# EAGLE board femtoBeacon_r2.0.3_PANELIZED (EAGLE 7.6.0), part 1 of 3
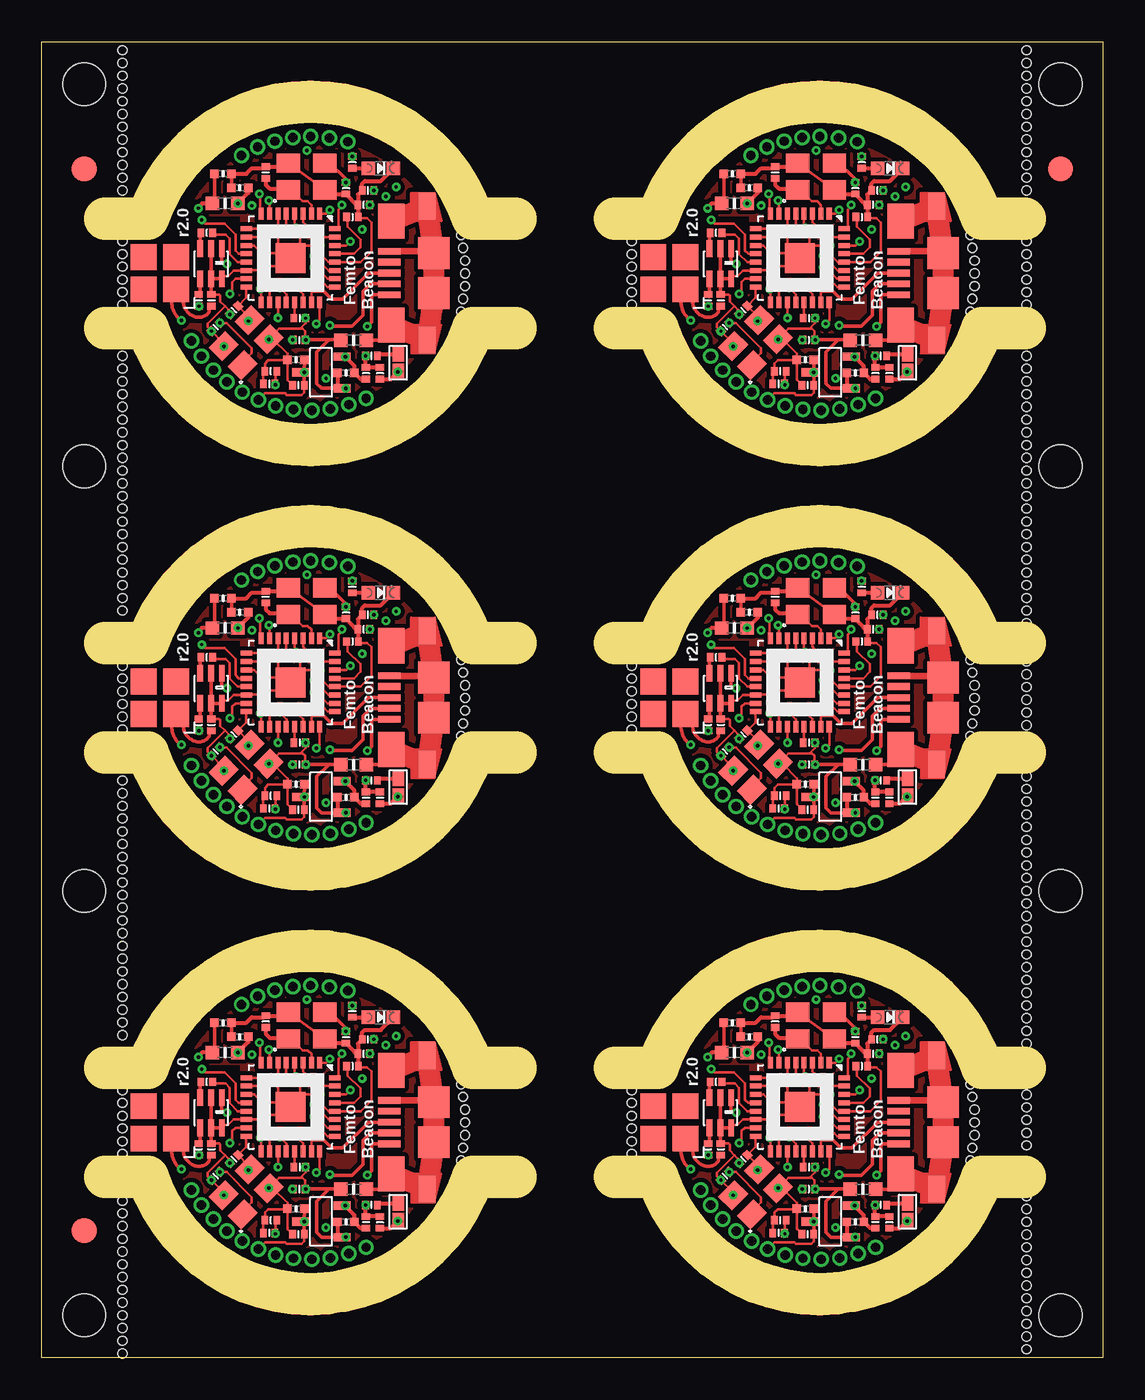
[diagram p0: board, top side]
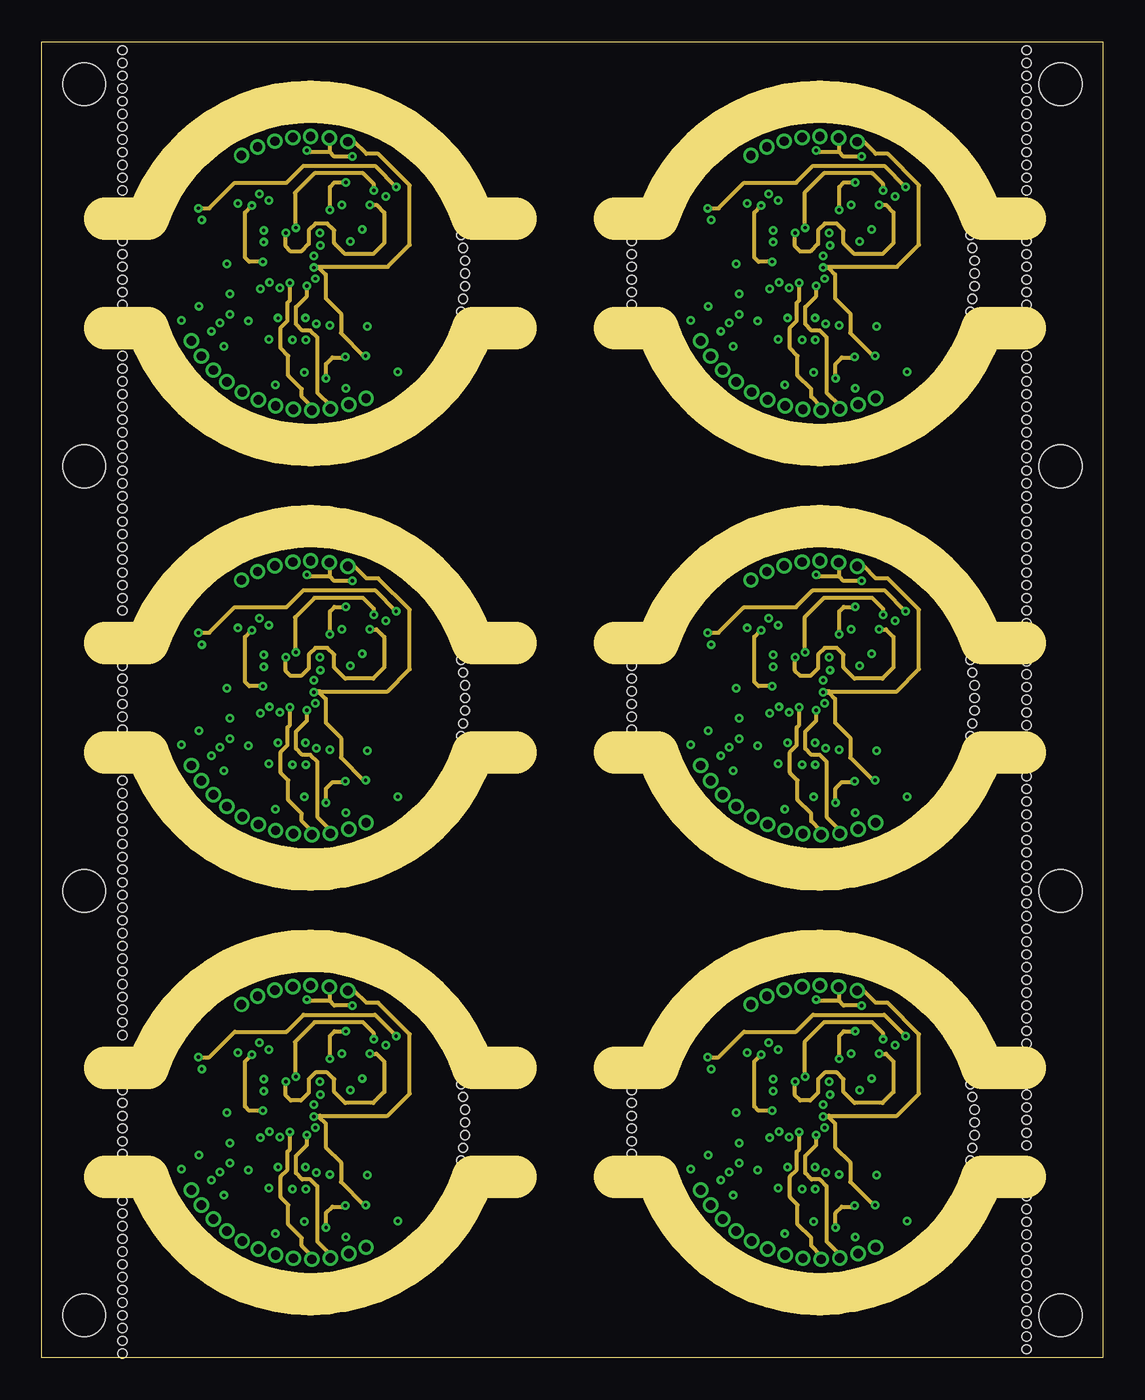
[diagram p1: board, inner layer Route2]
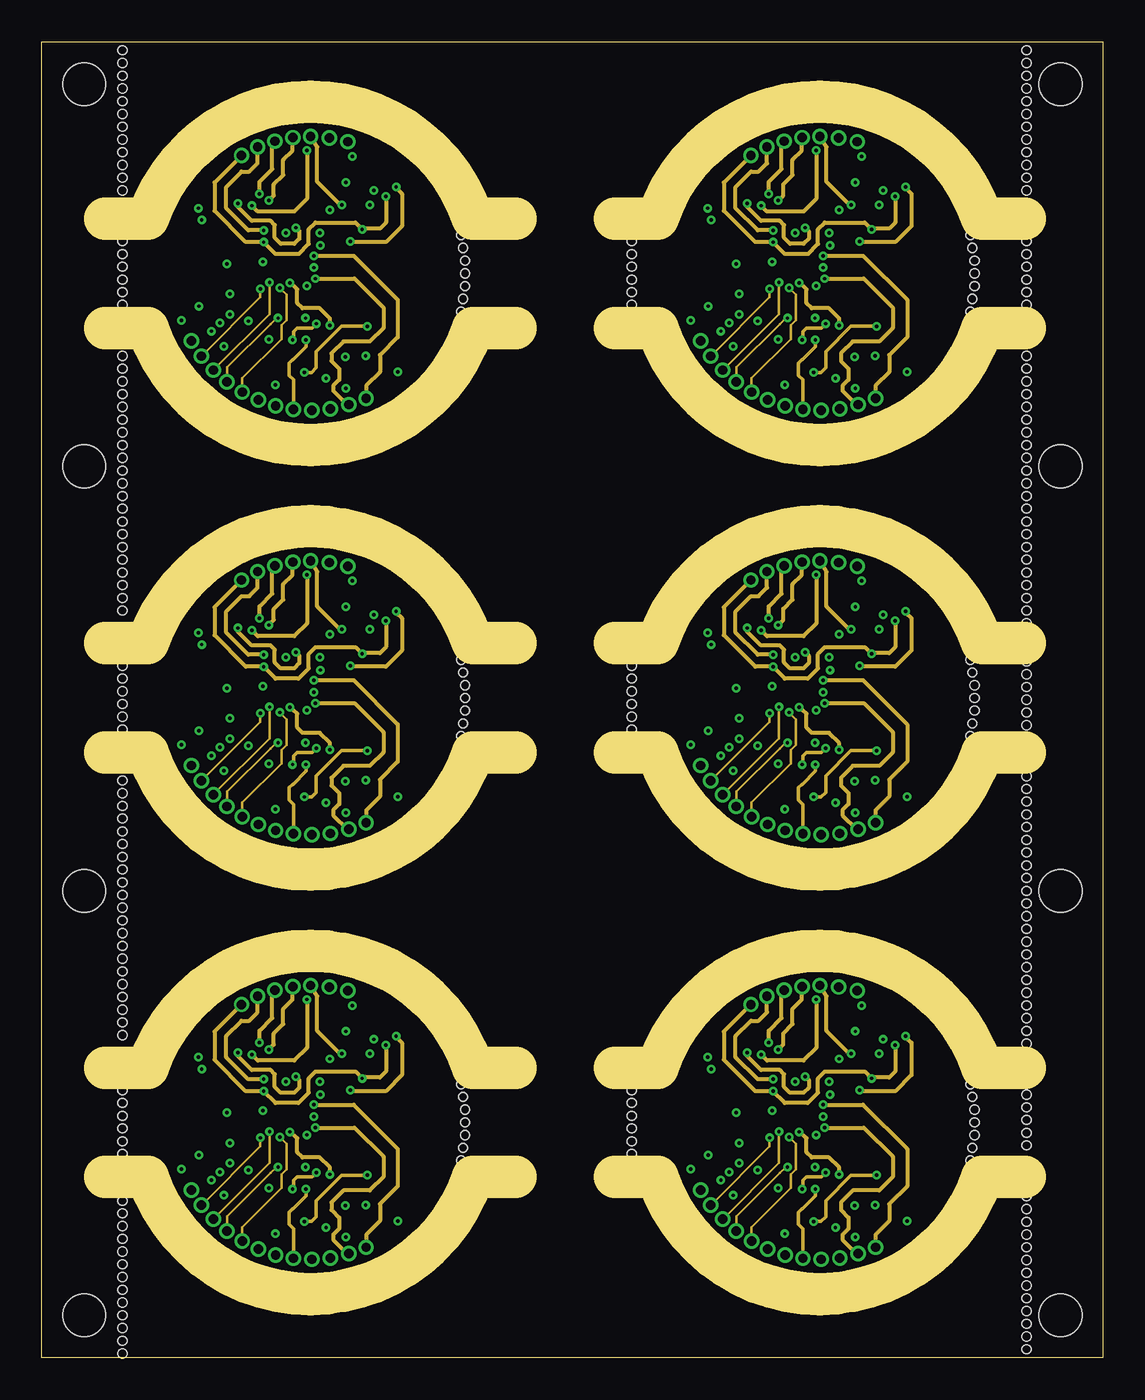
[diagram p2: board, inner layer Route15]
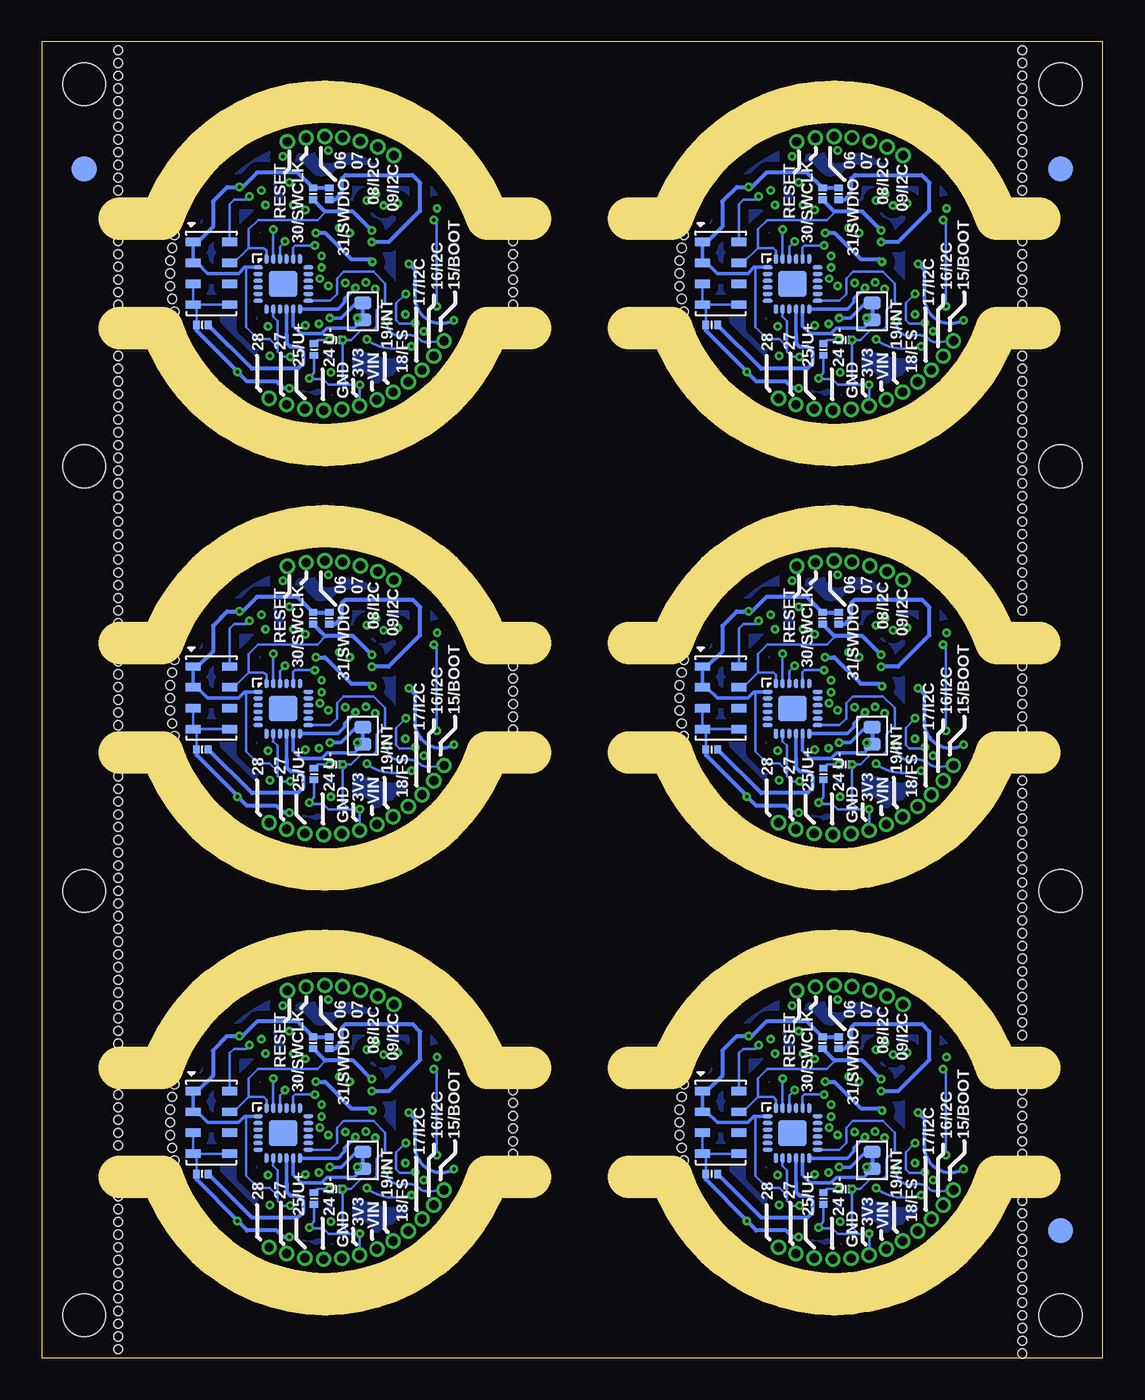
[diagram p3: board, bottom side, seen from below]

Size 63.5 x 78.74 mm. Coordinates in mm from the lower left corner, seen from the top.
Outline: 0,27.94 0,0 33.02,0
Outline: 0,25.4 0,53.34
Outline: 0,50.8 0,78.74 33.02,78.74
Outline: 63.5,27.94 63.5,0 30.48,0
Outline: 63.5,53.34 63.5,25.4
Outline: 30.48,78.74 63.5,78.74 63.5,50.8
Copper layers (1+2*15+16): Top 0.035mm / dielectric 0.7mm / Route2 0.035mm / dielectric 0.15mm / Route15 0.035mm / dielectric 0.2mm / Bottom 0.035mm
Design rules "AQS_custom_4layer": minimum track width 5mil, minimum drill 5mil, track to track 6mil, track to pad 6mil, pad to pad 6mil, via to via 6mil, smd to smd 1mil, copper to edge 15mil, drill to drill 6mil, minimum pad ring 7mil, minimum via ring 3mil, stop-mask expansion 2mil, vias tented up to drill 10mil, thermal gap 10mil
Holes 0.51 mm at 4.83,16 4.83,12.19 4.83,12.95 4.83,13.72 4.83,14.48 4.83,15.24 25.33,14.08 25.08,16.37 25.33,14.84 25.33,13.32 25.21,15.6 25.08,11.79 25.21,12.56 4.83,41.4 4.83,37.59 4.83,38.35 4.83,39.12 4.83,39.88 4.83,40.64 25.33,39.48 25.08,41.77 25.33,40.24 25.33,38.72 25.21,41 25.08,37.19 25.21,37.96 4.83,66.8 4.83,62.99 4.83,63.75 4.83,64.52 4.83,65.28 4.83,66.04 25.33,64.88 25.08,67.17 25.33,65.64 25.33,64.12 25.21,66.4 25.08,62.59 25.21,63.36 35.31,16 35.31,12.19 35.31,12.95 35.31,13.72 35.31,14.48 35.31,15.24 55.81,14.08 55.56,16.37 55.81,14.84 55.81,13.32 55.69,15.6 55.56,11.79 55.69,12.56 35.31,41.4 35.31,37.59 35.31,38.35 35.31,39.12 35.31,39.88 35.31,40.64 55.81,39.48 55.56,41.77 55.81,40.24 55.81,38.72 55.69,41 55.56,37.19 55.69,37.96 35.31,66.8 35.31,62.99 35.31,63.75 35.31,64.52 35.31,65.28 35.31,66.04 55.81,64.88 55.56,67.17 55.81,65.64 55.81,64.12 55.69,66.4 55.56,62.59 55.69,63.36 4.83,69.85 4.83,70.61 4.83,71.37 4.83,72.14 4.83,72.9 4.83,73.66 4.83,74.42 4.83,75.18 4.83,75.95 4.83,76.71 4.83,77.47 4.83,78.23 4.83,59.94 4.83,59.18 4.83,58.42 4.83,57.66 4.83,56.9 4.83,56.13 4.83,55.37 4.83,54.61 4.83,53.85 4.83,53.09 4.83,52.32 4.83,51.56 4.83,50.8 4.83,50.04 4.83,49.28 4.83,48.51 4.83,47.75 4.83,46.99 4.83,46.23 4.83,45.47 4.83,44.7 4.83,34.54 4.83,33.78 4.83,33.02 4.83,32.26 4.83,31.5 4.83,30.73 4.83,29.97 4.83,29.21 4.83,28.45 4.83,27.69 4.83,26.92 4.83,26.16 4.83,25.4 4.83,24.64 4.83,23.88 4.83,23.11 4.83,22.35 4.83,21.59 4.83,20.83 4.83,20.07 4.83,19.3 4.83,9.4 4.83,8.64 4.83,7.87 4.83,7.11 4.83,6.35 4.83,5.59 4.83,4.83 4.83,4.06 4.83,3.3 4.83,2.54 4.83,1.78 4.83,1.02 4.83,0.25 58.93,66.8 58.93,69.85 58.93,70.61 58.93,71.37 58.93,72.14 58.93,72.9 58.93,73.66 58.93,74.42 58.93,75.18 58.93,75.95 58.93,76.71 58.93,77.47 58.93,78.23 58.93,66.04 58.93,65.28 58.93,64.52 58.93,63.75 58.93,62.99 58.93,59.94 58.93,59.18 58.93,58.42 58.93,57.66 58.93,56.9 58.93,56.13 58.93,55.37 58.93,54.61 58.93,53.85 58.93,53.09 58.93,52.32 58.93,51.56 58.93,50.8 58.93,50.04 58.93,49.28 58.93,48.51 58.93,47.75 58.93,46.99 58.93,46.23 58.93,45.47 58.93,44.7 58.93,43.94 58.93,41.66 58.93,40.89 58.93,40.13 58.93,39.37 58.93,38.61 58.93,37.85 58.93,34.8 58.93,34.04 58.93,33.27 58.93,32.51 58.93,31.75 58.93,30.99 58.93,30.23 58.93,29.46 58.93,28.7 58.93,27.94 58.93,27.18 58.93,26.42 58.93,25.65 58.93,24.89 58.93,24.13 58.93,23.37 58.93,22.61 58.93,21.84 58.93,21.08 58.93,20.32 58.93,19.56 58.93,18.8 58.93,15.75 58.93,14.99 58.93,14.22 58.93,13.46 58.93,12.7 58.93,9.65 58.93,8.89 58.93,8.13 58.93,7.37 58.93,6.6 58.93,5.84 58.93,5.08 58.93,4.32 58.93,3.56 58.93,2.79 58.93,2.03 58.93,1.27 58.93,0.51
Holes 2.54 mm at 2.54,2.54 2.54,27.94 2.54,53.34 2.54,76.2 60.96,2.54 60.96,27.94 60.96,76.2 60.96,53.34
Milling: 48 lines

## Footprints (pad centres in the part's own frame; a part is rotated, then mirrored left to right if it is on the bottom)
0805_BALUN = smd 1 x 0.35: 1 -0.9,0.65; 2 -0.9,0; 3 -0.9,-0.65; 4 0.9,-0.65; 5 0.9,0; 6 0.9,0.65
MS5611-01BA03 = smd 0.9 x 0.5: 1 -1.1,1.875; 2 -1.1,0.625; 3 -1.1,-0.625; 4 -1.1,-1.875; 5 1.1,-1.875; 6 1.1,-0.625; 7 1.1,0.625; 8 1.1,1.875
SPST_SMD = smd 0.889 x 0.699: 1 -0.508,0; 2 0.508,0
PART = smd 0.4 x 0.5: 1 -0.35,0; 2 0.35,0
_0402MP = smd 0.5 x 0.5: 1 -0.508,0; 2 0.508,0
_0603MP = smd 0.8 x 0.8: 1 -0.762,0; 2 0.762,0
FIDUCIAL_1MM = smd 1.5 x 1.5: 1 0,0
QFN32 = smd 0.7 x 0.3: 1 -2.65,1.75; 2 -2.65,1.25; 3 -2.65,0.75; 4 -2.65,0.25; 5 -2.65,-0.25; 6 -2.65,-0.75; 7 -2.65,-1.25; 8 -2.65,-1.75; 17 2.65,-1.75; 18 2.65,-1.25; 19 2.65,-0.75; 20 2.65,-0.25; 21 2.65,0.25; 22 2.65,0.75; 23 2.65,1.25; 24 2.65,1.75 | smd 0.3 x 0.7: 9 -1.75,-2.65; 10 -1.25,-2.65; 11 -0.75,-2.65; 12 -0.25,-2.65; 13 0.25,-2.65; 14 0.75,-2.65; 15 1.25,-2.65; 16 1.75,-2.65; 25 1.75,2.65; 26 1.25,2.65; 27 0.75,2.65; 28 0.25,2.65; 29 -0.25,2.65; 30 -0.75,2.65; 31 -1.25,2.65; 32 -1.75,2.65 | smd 1.8 x 1.8: 33 0,0
QFN_3X3MM = smd 0.6 x 0.25: P$1 -1.5,1; P$2 -1.5,0.6; P$3 -1.5,0.2; P$4 -1.5,-0.2; P$5 -1.5,-0.6; P$6 -1.5,-1; P$13 1.5,-1; P$14 1.5,-0.6; P$15 1.5,-0.2; P$16 1.5,0.2; P$17 1.5,0.6; P$18 1.5,1 | smd 0.25 x 0.6: P$7 -1,-1.5; P$8 -0.6,-1.5; P$9 -0.2,-1.5; P$10 0.2,-1.5; P$11 0.6,-1.5; P$12 1,-1.5; P$19 1,1.5; P$20 0.6,1.5; P$21 0.2,1.5; P$22 -0.2,1.5; P$23 -0.6,1.5; P$24 -1,1.5 | smd 1.7 x 1.54: P$25 0,0
MCP1700T-3302E/TT = smd 0.5 x 1: GND -0.95,-1.25; VIN 0,1.25; VOUT 0.95,-1.25
CHIPLED_0603_NOOUTLINE = smd 0.8 x 0.8: A 0,-0.75; C 0,0.75
SOLDER_JUMP_CLOSED = smd 0.762 x 1.016: 1 -0.508,0; 2 0.508,0
1X1_ROUND = drill 0.559 pad 0.864: P$1 0,0
0479480001 = smd 1.54 x 1.54: ANT -0.963,0.963; NC1 0.978,0.963; NC2 0.978,-0.978; NC3 -0.963,-0.978
USB_MICROB_PACKAGE = smd 0.4 x 1.35: 1 -1.3,1.47; 2 -0.64,1.47; 3 0,1.47; 4 0.66,1.47; 5 1.3,1.47 | smd 2.1 x 1.6: 6 -3.1,1.35; 11 3.1,1.35 | smd 1.6 x 1: 7 -4,-0.8; 10 4,-0.8 | smd 1.9 x 1.9: 8 -1.2,-1.2; 9 1.2,-1.2
TSX-3225 = smd 1.4 x 1.15: 1 -1.1,-0.8; 2 1.1,-0.8; 3 1.1,0.8; 4 -1.1,0.8

## Placement (x,y rotation side)
BAL  JOHANSON_2450BM15A0015E  [0805_BALUN]  10.13,14.66 270 top
BAL1  JOHANSON_2450BM15A0015E  [0805_BALUN]  10.13,40.06 270 top
BAL2  JOHANSON_2450BM15A0015E  [0805_BALUN]  10.13,65.46 270 top
BAL3  JOHANSON_2450BM15A0015E  [0805_BALUN]  40.61,14.66 270 top
BAL4  JOHANSON_2450BM15A0015E  [0805_BALUN]  40.61,40.06 270 top
BAL5  JOHANSON_2450BM15A0015E  [0805_BALUN]  40.61,65.46 270 top
BARO  MS5611-01BA03  [MS5611-01BA03]  22.87,14.09 0 bottom
BARO1  MS5611-01BA03  [MS5611-01BA03]  22.87,39.49 0 bottom
BARO2  MS5611-01BA03  [MS5611-01BA03]  22.87,64.89 0 bottom
BARO3  MS5611-01BA03  [MS5611-01BA03]  53.35,14.09 0 bottom
BARO4  MS5611-01BA03  [MS5611-01BA03]  53.35,39.49 0 bottom
BARO5  MS5611-01BA03  [MS5611-01BA03]  53.35,64.89 0 bottom
BTN  DNP  [SPST_SMD]  21.33,8.74 270 top
BTN1  DNP  [SPST_SMD]  21.33,34.14 270 top
BTN2  DNP  [SPST_SMD]  21.33,59.54 270 top
BTN3  DNP  [SPST_SMD]  51.81,8.74 270 top
BTN4  DNP  [SPST_SMD]  51.81,34.14 270 top
BTN5  DNP  [SPST_SMD]  51.81,59.54 270 top
C1  0.1uF  [PART]  20.24,8.1 270 top
C2  0.1uF  [PART]  15.44,11.4 0 top
C3  10pF  [PART]  10.41,10.87 45 top
C4  10pF  [PART]  11.5,11.89 225 top
C5  2.2uF  [_0402MP]  18.21,8.13 180 top
C6  2.2uF  [_0402MP]  15.21,8.91 180 top
C7  0.47uF  [PART]  15.36,7.39 180 top
C8  0.1uF  [PART]  19.53,19.05 180 top
C9  0.1uF  [PART]  18.59,17.45 0 top
C10  0.1uF  [PART]  13.71,8.23 180 top
C11  22pF, C0G, 5%  [PART]  9.87,16.51 180 top
C12  22pF, C0G, 5%  [PART]  9.39,12.47 90 top
C13  DNP  [PART]  10.15,12.47 90 top
C14  9pF  [PART]  13.4,20.12 270 top
C15  9pF  [PART]  18.21,19.18 270 top
C16  0.1uF  [PART]  15.41,10.1 0 top
C17  0.1uF  [PART]  19.27,18.19 180 top
C18  0.1uF  [PART]  20.24,33.5 270 top
C19  0.1uF  [PART]  15.44,36.8 0 top
C20  2.2uF  [_0402MP]  18.21,33.53 180 top
C21  10uF  [_0402MP]  10.84,20.04 180 top
C22  10uF  [_0402MP]  11.86,19.2 0 top
C23  2.2uF  [_0402MP]  15.21,34.31 180 top
C24  0.47uF  [PART]  15.36,32.79 180 top
C25  0.1uF  [PART]  16.73,34.93 90 bottom
C26  0.1uF  [PART]  19.53,44.45 180 top
C27  0.1uF  [PART]  18.59,42.85 0 top
C28  0.1uF  [PART]  15.41,35.5 0 top
C29  0.1uF  [PART]  16.73,9.53 90 bottom
C30  0.1uF  [PART]  15.41,10.1 0 bottom
C31  10nF  [PART]  13.61,7.47 0 top
C32  0.1uF  [PART]  23.41,11 180 bottom
C33  0.1uF  [PART]  19.27,43.59 180 top
C34  10uF  [_0402MP]  10.84,45.44 180 top
C35  10uF  [_0402MP]  11.86,44.6 0 top
C36  0.1uF  [PART]  13.71,33.63 180 top
C37  10pF  [PART]  10.41,36.27 45 top
C38  10pF  [PART]  11.5,37.29 225 top
C39  22pF, C0G, 5%  [PART]  9.87,41.91 180 top
C40  22pF, C0G, 5%  [PART]  9.39,37.87 90 top
C41  DNP  [PART]  10.15,37.87 90 top
C42  9pF  [PART]  13.4,45.52 270 top
C43  9pF  [PART]  18.21,44.58 270 top
C44  10nF  [PART]  13.61,32.87 0 top
C45  0.1uF  [PART]  15.41,35.5 0 bottom
C46  0.1uF  [PART]  23.41,36.4 180 bottom
C47  0.1uF  [PART]  20.24,58.9 270 top
C48  0.1uF  [PART]  15.44,62.2 0 top
C49  2.2uF  [_0402MP]  18.21,58.93 180 top
C50  2.2uF  [_0402MP]  15.21,59.71 180 top
C51  0.47uF  [PART]  15.36,58.19 180 top
C52  0.1uF  [PART]  16.73,60.33 90 bottom
C53  0.1uF  [PART]  19.53,69.85 180 top
C54  0.1uF  [PART]  18.59,68.25 0 top
C55  0.1uF  [PART]  15.41,60.9 0 top
C56  0.1uF  [PART]  19.27,68.99 180 top
C57  10uF  [_0402MP]  10.84,70.84 180 top
C58  10uF  [_0402MP]  11.86,70 0 top
C59  0.1uF  [PART]  13.71,59.03 180 top
C60  10pF  [PART]  10.41,61.67 45 top
C61  10pF  [PART]  11.5,62.69 225 top
C62  22pF, C0G, 5%  [PART]  9.87,67.31 180 top
C63  22pF, C0G, 5%  [PART]  9.39,63.27 90 top
C64  DNP  [PART]  10.15,63.27 90 top
C65  9pF  [PART]  13.4,70.92 270 top
C66  9pF  [PART]  18.21,69.98 270 top
C67  10nF  [PART]  13.61,58.27 0 top
C68  0.1uF  [PART]  15.41,60.9 0 bottom
C69  0.1uF  [PART]  23.41,61.8 180 bottom
C70  0.1uF  [PART]  50.72,8.1 270 top
C71  0.1uF  [PART]  45.92,11.4 0 top
C72  2.2uF  [_0402MP]  48.69,8.13 180 top
C73  2.2uF  [_0402MP]  45.69,8.91 180 top
C74  0.47uF  [PART]  45.84,7.39 180 top
C75  0.1uF  [PART]  47.21,9.53 90 bottom
C76  0.1uF  [PART]  50.01,19.05 180 top
C77  0.1uF  [PART]  49.07,17.45 0 top
C78  0.1uF  [PART]  45.89,10.1 0 top
C79  0.1uF  [PART]  49.75,18.19 180 top
C80  10uF  [_0402MP]  41.32,20.04 180 top
C81  10uF  [_0402MP]  42.34,19.2 0 top
C82  0.1uF  [PART]  44.19,8.23 180 top
C83  10pF  [PART]  40.89,10.87 45 top
C84  10pF  [PART]  41.98,11.89 225 top
C85  22pF, C0G, 5%  [PART]  40.35,16.51 180 top
C86  22pF, C0G, 5%  [PART]  39.87,12.47 90 top
C87  DNP  [PART]  40.63,12.47 90 top
C88  9pF  [PART]  43.88,20.12 270 top
C89  9pF  [PART]  48.69,19.18 270 top
C90  10nF  [PART]  44.09,7.47 0 top
C91  0.1uF  [PART]  45.89,10.1 0 bottom
C92  0.1uF  [PART]  53.89,11 180 bottom
C93  0.1uF  [PART]  50.72,33.5 270 top
C94  0.1uF  [PART]  45.92,36.8 0 top
C95  2.2uF  [_0402MP]  48.69,33.53 180 top
C96  2.2uF  [_0402MP]  45.69,34.31 180 top
C97  0.47uF  [PART]  45.84,32.79 180 top
C98  0.1uF  [PART]  47.21,34.93 90 bottom
C99  0.1uF  [PART]  50.01,44.45 180 top
C100  0.1uF  [PART]  49.07,42.85 0 top
C101  0.1uF  [PART]  45.89,35.5 0 top
C102  0.1uF  [PART]  49.75,43.59 180 top
C103  10uF  [_0402MP]  41.32,45.44 180 top
C104  10uF  [_0402MP]  42.34,44.6 0 top
C105  0.1uF  [PART]  44.19,33.63 180 top
C106  10pF  [PART]  40.89,36.27 45 top
C107  10pF  [PART]  41.98,37.29 225 top
C108  22pF, C0G, 5%  [PART]  40.35,41.91 180 top
C109  22pF, C0G, 5%  [PART]  39.87,37.87 90 top
C110  DNP  [PART]  40.63,37.87 90 top
C111  9pF  [PART]  43.88,45.52 270 top
C112  9pF  [PART]  48.69,44.58 270 top
C113  10nF  [PART]  44.09,32.87 0 top
C114  0.1uF  [PART]  45.89,35.5 0 bottom
C115  0.1uF  [PART]  53.89,36.4 180 bottom
C116  0.1uF  [PART]  50.72,58.9 270 top
C117  0.1uF  [PART]  45.92,62.2 0 top
C118  2.2uF  [_0402MP]  48.69,58.93 180 top
C119  2.2uF  [_0402MP]  45.69,59.71 180 top
C120  0.47uF  [PART]  45.84,58.19 180 top
C121  0.1uF  [PART]  47.21,60.33 90 bottom
C122  0.1uF  [PART]  50.01,69.85 180 top
C123  0.1uF  [PART]  49.07,68.25 0 top
C124  0.1uF  [PART]  45.89,60.9 0 top
C125  0.1uF  [PART]  49.75,68.99 180 top
C126  10uF  [_0402MP]  41.32,70.84 180 top
C127  10uF  [_0402MP]  42.34,70 0 top
C128  0.1uF  [PART]  44.19,59.03 180 top
C129  10pF  [PART]  40.89,61.67 45 top
C130  10pF  [PART]  41.98,62.69 225 top
C131  22pF, C0G, 5%  [PART]  40.35,67.31 180 top
C132  22pF, C0G, 5%  [PART]  39.87,63.27 90 top
C133  DNP  [PART]  40.63,63.27 90 top
C134  9pF  [PART]  43.88,70.92 270 top
C135  9pF  [PART]  48.69,69.98 270 top
C136  10nF  [PART]  44.09,58.27 0 top
C137  0.1uF  [PART]  45.89,60.9 0 bottom
C138  0.1uF  [PART]  53.89,61.8 180 bottom
FB1  [_0603MP]  18.66,10.08 180 top
FB2  [_0603MP]  18.66,35.48 180 top
FB3  [_0603MP]  18.66,60.88 180 top
FB4  [_0603MP]  49.14,10.08 180 top
FB5  [_0603MP]  49.14,35.48 180 top
FB6  [_0603MP]  49.14,60.88 180 top
FID1  FIDUCIAL  [FIDUCIAL_1MM]  2.54,7.62 0 top
FID2  FIDUCIAL  [FIDUCIAL_1MM]  2.54,71.12 0 top
FID3  FIDUCIAL  [FIDUCIAL_1MM]  60.96,71.12 0 top
FID4  FIDUCIAL  [FIDUCIAL_1MM]  2.54,7.62 0 bottom
FID5  FIDUCIAL  [FIDUCIAL_1MM]  2.54,71.12 0 bottom
FID6  FIDUCIAL  [FIDUCIAL_1MM]  60.96,71.12 0 bottom
IC  ATSAMR21E18A-MUT  [QFN32]  14.89,15 270 top
IC1  ATSAMR21E18A-MUT  [QFN32]  14.89,40.4 270 top
IC2  ATSAMR21E18A-MUT  [QFN32]  14.89,65.8 270 top
IC3  ATSAMR21E18A-MUT  [QFN32]  45.37,15 270 top
IC4  ATSAMR21E18A-MUT  [QFN32]  45.37,40.4 270 top
IC5  ATSAMR21E18A-MUT  [QFN32]  45.37,65.8 270 top
IMU  MPU-9250  [QFN_3X3MM]  18.57,13.45 0 bottom
IMU1  MPU-9250  [QFN_3X3MM]  18.57,38.84 0 bottom
IMU2  MPU-9250  [QFN_3X3MM]  18.57,64.25 0 bottom
IMU3  MPU-9250  [QFN_3X3MM]  49.05,13.45 0 bottom
IMU4  MPU-9250  [QFN_3X3MM]  49.05,38.84 0 bottom
IMU5  MPU-9250  [QFN_3X3MM]  49.05,64.25 0 bottom
L1  10uH  [_0603MP]  10.97,43.66 0 top
L2  10uH  [_0603MP]  10.97,69.06 0 top
L3  10uH  [_0603MP]  41.45,18.26 0 top
L4  10uH  [_0603MP]  41.45,43.66 0 top
L5  10uH  [_0603MP]  41.45,69.06 0 top
L6  10uH  [_0603MP]  10.97,18.26 0 top
LDO_VREG  MCP1700T-3302E/TT  [MCP1700T-3302E/TT]  16.72,8.15 90 top
LDO_VREG1  MCP1700T-3302E/TT  [MCP1700T-3302E/TT]  16.72,33.55 90 top
LDO_VREG2  MCP1700T-3302E/TT  [MCP1700T-3302E/TT]  16.72,58.95 90 top
LDO_VREG3  MCP1700T-3302E/TT  [MCP1700T-3302E/TT]  47.2,8.15 90 top
LDO_VREG4  MCP1700T-3302E/TT  [MCP1700T-3302E/TT]  47.2,33.55 90 top
LDO_VREG5  MCP1700T-3302E/TT  [MCP1700T-3302E/TT]  47.2,58.95 90 top
LED1  BLUE  [CHIPLED_0603_NOOUTLINE]  20.29,45.77 270 top
LED2  BLUE  [CHIPLED_0603_NOOUTLINE]  20.29,20.37 270 top
LED3  BLUE  [CHIPLED_0603_NOOUTLINE]  20.29,71.17 270 top
LED4  BLUE  [CHIPLED_0603_NOOUTLINE]  50.77,20.37 270 top
LED5  BLUE  [CHIPLED_0603_NOOUTLINE]  50.77,45.77 270 top
LED6  BLUE  [CHIPLED_0603_NOOUTLINE]  50.77,71.17 270 top
R1  330  [PART]  19.73,9.14 180 top
R2  10K  [PART]  19.4,8.1 270 top
R3  330  [PART]  19.73,34.54 180 top
R4  330  [PART]  18.59,20.73 270 top
R5  10K  [PART]  19.4,33.5 270 top
R6  330  [PART]  18.59,46.13 270 top
R7  2.2K  [PART]  16.78,44.25 90 bottom
R8  2.2K  [PART]  16.78,18.85 90 bottom
R9  2.2K  [PART]  15.82,18.85 90 bottom
R10  2.2K  [PART]  15.82,44.25 90 bottom
R11  330  [PART]  19.73,59.94 180 top
R12  10K  [PART]  19.4,58.9 270 top
R13  330  [PART]  18.59,71.53 270 top
R14  2.2K  [PART]  16.78,69.65 90 bottom
R15  2.2K  [PART]  15.82,69.65 90 bottom
R16  330  [PART]  50.21,9.14 180 top
R17  10K  [PART]  49.88,8.1 270 top
R18  330  [PART]  49.07,20.73 270 top
R19  2.2K  [PART]  47.26,18.85 90 bottom
R20  2.2K  [PART]  46.3,18.85 90 bottom
R21  330  [PART]  50.21,34.54 180 top
R22  10K  [PART]  49.88,33.5 270 top
R23  330  [PART]  49.07,46.13 270 top
R24  2.2K  [PART]  47.26,44.25 90 bottom
R25  2.2K  [PART]  46.3,44.25 90 bottom
R26  330  [PART]  50.21,59.94 180 top
R27  10K  [PART]  49.88,58.9 270 top
R28  330  [PART]  49.07,71.53 270 top
R29  2.2K  [PART]  47.26,69.65 90 bottom
R30  2.2K  [PART]  46.3,69.65 90 bottom
SJ1  SOLDER_JUMPER_CLOSED  [SOLDER_JUMP_CLOSED]  13.81,11.81 270 bottom
SJ2  SOLDER_JUMPER_CLOSED  [SOLDER_JUMP_CLOSED]  13.81,37.21 270 bottom
SJ3  SOLDER_JUMPER_CLOSED  [SOLDER_JUMP_CLOSED]  13.81,62.61 270 bottom
SJ4  SOLDER_JUMPER_CLOSED  [SOLDER_JUMP_CLOSED]  44.29,11.81 270 bottom
SJ5  SOLDER_JUMPER_CLOSED  [SOLDER_JUMP_CLOSED]  44.29,37.21 270 bottom
SJ6  SOLDER_JUMPER_CLOSED  [SOLDER_JUMP_CLOSED]  44.29,62.61 270 bottom
U$1  1X1_ROUND  [1X1_ROUND]  12.96,6.51 0 top
U$2  1X1_ROUND  [1X1_ROUND]  15.06,5.95 0 top
U$3  1X1_ROUND  [1X1_ROUND]  12.96,31.91 0 top
U$4  1X1_ROUND  [1X1_ROUND]  15.06,31.35 0 top
U$5  1X1_ROUND  [1X1_ROUND]  14,6.15 0 top
U$6  1X1_ROUND  [1X1_ROUND]  14,31.55 0 top
U$7  1X1_ROUND  [1X1_ROUND]  18.37,6.23 0 top
U$8  0479480001  [0479480001]  7.08,14.08 180 top
U$9  1X1_ROUND  [1X1_ROUND]  16.16,5.89 0 top
U$10  1X1_ROUND  [1X1_ROUND]  17.27,5.97 0 top
U$11  1X1_ROUND  [1X1_ROUND]  11.99,32.38 0 top
U$12  1X1_ROUND  [1X1_ROUND]  11.08,32.98 0 top
U$13  1X1_ROUND  [1X1_ROUND]  10.27,33.69 0 top
U$14  1X1_ROUND  [1X1_ROUND]  9.56,34.53 0 top
U$15  1X1_ROUND  [1X1_ROUND]  8.95,35.44 0 top
U$16  1X1_ROUND  [1X1_ROUND]  11.96,46.54 0 top
U$17  1X1_ROUND  [1X1_ROUND]  12.92,47.04 0 top
U$18  1X1_ROUND  [1X1_ROUND]  13.95,47.39 0 top
U$19  1X1_ROUND  [1X1_ROUND]  18.32,47.36 0 top
U$20  1X1_ROUND  [1X1_ROUND]  17.2,47.58 0 top
U$21  1X1_ROUND  [1X1_ROUND]  16.08,47.68 0 top
U$22  1X1_ROUND  [1X1_ROUND]  18.37,31.63 0 top
U$23  1X1_ROUND  [1X1_ROUND]  19.41,32 0 top
U$24  1X1_ROUND  [1X1_ROUND]  15.02,47.61 0 top
U$25  1X1_ROUND  [1X1_ROUND]  16.16,31.29 0 top
U$26  1X1_ROUND  [1X1_ROUND]  17.27,31.37 0 top
U$27  0479480001  [0479480001]  7.08,39.48 180 top
U$28  1X1_ROUND  [1X1_ROUND]  12.96,57.31 0 top
U$29  1X1_ROUND  [1X1_ROUND]  15.06,56.75 0 top
U$30  1X1_ROUND  [1X1_ROUND]  14,56.95 0 top
U$31  1X1_ROUND  [1X1_ROUND]  11.99,57.78 0 top
U$32  1X1_ROUND  [1X1_ROUND]  11.08,58.38 0 top
U$33  1X1_ROUND  [1X1_ROUND]  10.27,59.09 0 top
U$34  1X1_ROUND  [1X1_ROUND]  9.56,59.93 0 top
U$35  1X1_ROUND  [1X1_ROUND]  11.99,6.98 0 top
U$36  1X1_ROUND  [1X1_ROUND]  11.08,7.58 0 top
U$37  1X1_ROUND  [1X1_ROUND]  10.27,8.29 0 top
U$38  1X1_ROUND  [1X1_ROUND]  9.56,9.13 0 top
U$39  1X1_ROUND  [1X1_ROUND]  8.95,10.04 0 top
U$40  1X1_ROUND  [1X1_ROUND]  8.95,60.84 0 top
U$41  1X1_ROUND  [1X1_ROUND]  11.96,21.14 0 top
U$42  1X1_ROUND  [1X1_ROUND]  12.92,21.64 0 top
U$43  1X1_ROUND  [1X1_ROUND]  13.95,21.99 0 top
U$44  1X1_ROUND  [1X1_ROUND]  11.96,71.94 0 top
U$45  1X1_ROUND  [1X1_ROUND]  18.32,21.96 0 top
U$46  1X1_ROUND  [1X1_ROUND]  17.2,22.18 0 top
U$47  1X1_ROUND  [1X1_ROUND]  16.08,22.28 0 top
U$48  1X1_ROUND  [1X1_ROUND]  19.41,6.6 0 top
U$49  1X1_ROUND  [1X1_ROUND]  12.92,72.44 0 top
U$50  1X1_ROUND  [1X1_ROUND]  13.95,72.79 0 top
U$51  1X1_ROUND  [1X1_ROUND]  18.32,72.76 0 top
U$52  1X1_ROUND  [1X1_ROUND]  17.2,72.98 0 top
U$53  1X1_ROUND  [1X1_ROUND]  16.08,73.08 0 top
U$54  1X1_ROUND  [1X1_ROUND]  15.02,22.21 0 top
U$55  1X1_ROUND  [1X1_ROUND]  18.37,57.03 0 top
U$56  1X1_ROUND  [1X1_ROUND]  19.41,57.4 0 top
U$57  1X1_ROUND  [1X1_ROUND]  15.02,73.01 0 top
U$58  1X1_ROUND  [1X1_ROUND]  16.16,56.69 0 top
U$59  1X1_ROUND  [1X1_ROUND]  17.27,56.77 0 top
U$60  0479480001  [0479480001]  7.08,64.88 180 top
U$61  1X1_ROUND  [1X1_ROUND]  43.44,6.51 0 top
U$62  1X1_ROUND  [1X1_ROUND]  45.54,5.95 0 top
U$63  1X1_ROUND  [1X1_ROUND]  44.48,6.15 0 top
U$64  1X1_ROUND  [1X1_ROUND]  42.47,6.98 0 top
U$65  1X1_ROUND  [1X1_ROUND]  41.56,7.58 0 top
U$66  1X1_ROUND  [1X1_ROUND]  40.75,8.29 0 top
U$67  1X1_ROUND  [1X1_ROUND]  40.04,9.13 0 top
U$68  1X1_ROUND  [1X1_ROUND]  39.43,10.04 0 top
U$69  1X1_ROUND  [1X1_ROUND]  42.44,21.14 0 top
U$70  1X1_ROUND  [1X1_ROUND]  43.4,21.64 0 top
U$71  1X1_ROUND  [1X1_ROUND]  44.43,21.99 0 top
U$72  1X1_ROUND  [1X1_ROUND]  48.8,21.96 0 top
U$73  1X1_ROUND  [1X1_ROUND]  47.68,22.18 0 top
U$74  1X1_ROUND  [1X1_ROUND]  46.56,22.28 0 top
U$75  1X1_ROUND  [1X1_ROUND]  48.85,6.23 0 top
U$76  1X1_ROUND  [1X1_ROUND]  49.89,6.6 0 top
U$77  1X1_ROUND  [1X1_ROUND]  45.5,22.21 0 top
U$78  1X1_ROUND  [1X1_ROUND]  46.64,5.89 0 top
U$79  1X1_ROUND  [1X1_ROUND]  47.75,5.97 0 top
U$80  0479480001  [0479480001]  37.56,14.08 180 top
U$81  1X1_ROUND  [1X1_ROUND]  43.44,31.91 0 top
U$82  1X1_ROUND  [1X1_ROUND]  45.54,31.35 0 top
U$83  1X1_ROUND  [1X1_ROUND]  44.48,31.55 0 top
U$84  1X1_ROUND  [1X1_ROUND]  42.47,32.38 0 top
U$85  1X1_ROUND  [1X1_ROUND]  41.56,32.98 0 top
U$86  1X1_ROUND  [1X1_ROUND]  40.75,33.69 0 top
U$87  1X1_ROUND  [1X1_ROUND]  40.04,34.53 0 top
U$88  1X1_ROUND  [1X1_ROUND]  39.43,35.44 0 top
U$89  1X1_ROUND  [1X1_ROUND]  42.44,46.54 0 top
U$90  1X1_ROUND  [1X1_ROUND]  43.4,47.04 0 top
U$91  1X1_ROUND  [1X1_ROUND]  44.43,47.39 0 top
U$92  1X1_ROUND  [1X1_ROUND]  48.8,47.36 0 top
U$93  1X1_ROUND  [1X1_ROUND]  47.68,47.58 0 top
U$94  1X1_ROUND  [1X1_ROUND]  46.56,47.68 0 top
U$95  1X1_ROUND  [1X1_ROUND]  48.85,31.63 0 top
U$96  1X1_ROUND  [1X1_ROUND]  49.89,32 0 top
U$97  1X1_ROUND  [1X1_ROUND]  45.5,47.61 0 top
U$98  1X1_ROUND  [1X1_ROUND]  46.64,31.29 0 top
U$99  1X1_ROUND  [1X1_ROUND]  47.75,31.37 0 top
U$100  0479480001  [0479480001]  37.56,39.48 180 top
U$101  1X1_ROUND  [1X1_ROUND]  43.44,57.31 0 top
U$102  1X1_ROUND  [1X1_ROUND]  45.54,56.75 0 top
U$103  1X1_ROUND  [1X1_ROUND]  44.48,56.95 0 top
U$104  1X1_ROUND  [1X1_ROUND]  42.47,57.78 0 top
U$105  1X1_ROUND  [1X1_ROUND]  41.56,58.38 0 top
U$106  1X1_ROUND  [1X1_ROUND]  40.75,59.09 0 top
U$107  1X1_ROUND  [1X1_ROUND]  40.04,59.93 0 top
U$108  1X1_ROUND  [1X1_ROUND]  39.43,60.84 0 top
U$109  1X1_ROUND  [1X1_ROUND]  42.44,71.94 0 top
U$110  1X1_ROUND  [1X1_ROUND]  43.4,72.44 0 top
U$111  1X1_ROUND  [1X1_ROUND]  44.43,72.79 0 top
U$112  1X1_ROUND  [1X1_ROUND]  48.8,72.76 0 top
U$113  1X1_ROUND  [1X1_ROUND]  47.68,72.98 0 top
U$114  1X1_ROUND  [1X1_ROUND]  46.56,73.08 0 top
U$115  1X1_ROUND  [1X1_ROUND]  48.85,57.03 0 top
U$116  1X1_ROUND  [1X1_ROUND]  49.89,57.4 0 top
U$117  1X1_ROUND  [1X1_ROUND]  45.5,73.01 0 top
U$118  1X1_ROUND  [1X1_ROUND]  46.64,56.69 0 top
U$119  1X1_ROUND  [1X1_ROUND]  47.75,56.77 0 top
U$120  0479480001  [0479480001]  37.56,64.88 180 top
USB  USB_MICROB  [USB_MICROB_PACKAGE]  22.26,14.1 90 top
USB1  USB_MICROB  [USB_MICROB_PACKAGE]  22.26,39.5 90 top
USB2  USB_MICROB  [USB_MICROB_PACKAGE]  22.26,64.9 90 top
USB3  USB_MICROB  [USB_MICROB_PACKAGE]  52.74,14.1 90 top
USB4  USB_MICROB  [USB_MICROB_PACKAGE]  52.74,39.5 90 top
USB5  USB_MICROB  [USB_MICROB_PACKAGE]  52.74,64.9 90 top
XOSC  12MHz  [TSX-3225]  12.24,9.93 45 top
XOSC1  12MHz  [TSX-3225]  12.24,35.33 45 top
XOSC2  12MHz  [TSX-3225]  12.24,60.73 45 top
XOSC3  12MHz  [TSX-3225]  42.72,9.93 45 top
XOSC4  12MHz  [TSX-3225]  42.72,35.33 45 top
XOSC5  12MHz  [TSX-3225]  42.72,60.73 45 top
XOSCRF  16MHz  [TSX-3225]  15.85,19.88 0 top
XOSCRF1  16MHz  [TSX-3225]  15.85,45.28 0 top
XOSCRF2  16MHz  [TSX-3225]  15.85,70.68 0 top
XOSCRF3  16MHz  [TSX-3225]  46.33,19.88 0 top
XOSCRF4  16MHz  [TSX-3225]  46.33,45.28 0 top
XOSCRF5  16MHz  [TSX-3225]  46.33,70.68 0 top

## Library data of the parts
BAL BAL1-BAL5 = balun
BARO BARO1-BARO5 = freeimu
BTN BTN1-BTN5 USB USB1-USB5 = femtoduino
C1-C4 C8-C19 C25-C33 C36-C48 C52-C56 C59-C71 C75-C79 C82-C94 C98-C102 C105-C117 C121-C125 C128-C138 = parts_0201; DIGIKEY_PART: 490-3194-1-ND
C5 C6 C20-C23 C34 C35 C49 C50 C57 C58 C72 C73 C80 C81 C95 C96 C103 C104 C118 C119 C126 C127 FB1-FB6 L1-L6 LED1-LED6 = microbuilder
C7 C24 C51 C74 C97 C120 R1-R30 = parts_0201
FID1-FID6 = adafruit
IC IC1-IC5 = atmel-samr21
IMU IMU1-IMU5 = mpu9250
LDO_VREG LDO_VREG1-LDO_VREG5 = MCP1700T-3302E_TT
SJ1-SJ6 = solder-jumpers
U$1-U$7 U$9-U$26 U$28-U$59 U$61-U$79 U$81-U$99 U$101-U$119 = pins_1.27mm_pitch
U$8 U$27 U$60 U$80 U$100 U$120 = molex-antenna-2.4GHz
XOSC XOSC1-XOSC5 XOSCRF XOSCRF1-XOSCRF5 = crystals

## Nets
3.3V: BARO.1 BARO.2 C5.1 C10.1 C16.1 C21.2 C29.1 C30.2 C31.2 IC.24 IC.30 IMU.P$1 IMU.P$8 IMU.P$13 IMU.P$22 L6.1 LDO_VREG.VOUT R2.2 R8.2 R9.2 U$5.P$1
3.3V1: BARO1.1 BARO1.2 C20.1 C25.1 C28.1 C34.2 C36.1 C44.2 C45.2 IC1.24 IC1.30 IMU1.P$1 IMU1.P$8 IMU1.P$13 IMU1.P$22 L1.1 LDO_VREG1.VOUT R5.2 R7.2 R10.2 U$6.P$1
3.3V2: BARO2.1 BARO2.2 C49.1 C52.1 C55.1 C57.2 C59.1 C67.2 C68.2 IC2.24 IC2.30 IMU2.P$1 IMU2.P$8 IMU2.P$13 IMU2.P$22 L2.1 LDO_VREG2.VOUT R12.2 R14.2 R15.2 U$30.P$1
3.3V3: BARO3.1 BARO3.2 C72.1 C75.1 C78.1 C80.2 C82.1 C90.2 C91.2 IC3.24 IC3.30 IMU3.P$1 IMU3.P$8 IMU3.P$13 IMU3.P$22 L3.1 LDO_VREG3.VOUT R17.2 R19.2 R20.2 U$63.P$1
3.3V4: BARO4.1 BARO4.2 C95.1 C98.1 C101.1 C103.2 C105.1 C113.2 C114.2 IC4.24 IC4.30 IMU4.P$1 IMU4.P$8 IMU4.P$13 IMU4.P$22 L4.1 LDO_VREG4.VOUT R22.2 R24.2 R25.2 U$83.P$1
3.3V5: BARO5.1 BARO5.2 C118.1 C121.1 C124.1 C126.2 C128.1 C136.2 C137.2 IC5.24 IC5.30 IMU5.P$1 IMU5.P$8 IMU5.P$13 IMU5.P$22 L5.1 LDO_VREG5.VOUT R27.2 R29.2 R30.2 U$103.P$1
ANT_OUT: BAL.1 C13.1 U$8.ANT
ANT_OUT1: BAL1.1 C41.1 U$27.ANT
ANT_OUT2: BAL2.1 C64.1 U$60.ANT
ANT_OUT3: BAL3.1 C87.1 U$80.ANT
ANT_OUT4: BAL4.1 C110.1 U$100.ANT
ANT_OUT5: BAL5.1 C133.1 U$120.ANT
AVDD: C17.1 IC.5
AVDD1: C33.1 IC1.5
AVDD2: C56.1 IC2.5
AVDD3: C79.1 IC3.5
AVDD4: C102.1 IC4.5
AVDD5: C125.1 IC5.5
DVDD: C2.1 IC.21
DVDD1: C19.1 IC1.21
DVDD2: C48.1 IC2.21
DVDD3: C71.1 IC3.21
DVDD4: C94.1 IC4.21
DVDD5: C117.1 IC5.21
GND: BAL.2 BAL.5 BAL.6 BARO.3 BARO.4 BARO.5 BTN.2 C1.2 C2.2 C3.1 C4.2 C5.2 C6.2 C7.2 C8.2 C9.2 C10.2 C13.2 C14.1 C15.2 C16.2 C17.2 C21.1 C22.1 C29.2 C30.1 C31.1 C32.2 FB1.2 IC.3 IC.6 IC.11 IC.14 IC.28 IC.33 IMU.P$20 LDO_VREG.GND LED2.C SJ1.1 U$2.P$1 XOSC.2 XOSC.4 XOSCRF.2 XOSCRF.4
GND1: BAL1.2 BAL1.5 BAL1.6 BARO1.3 BARO1.4 BARO1.5 BTN1.2 C18.2 C19.2 C20.2 C23.2 C24.2 C25.2 C26.2 C27.2 C28.2 C33.2 C34.1 C35.1 C36.2 C37.1 C38.2 C41.2 C42.1 C43.2 C44.1 C45.1 C46.2 FB2.2 IC1.3 IC1.6 IC1.11 IC1.14 IC1.28 IC1.33 IMU1.P$20 LDO_VREG1.GND LED1.C SJ2.1 U$4.P$1 XOSC1.2 XOSC1.4 XOSCRF1.2 XOSCRF1.4
GND2: BAL2.2 BAL2.5 BAL2.6 BARO2.3 BARO2.4 BARO2.5 BTN2.2 C47.2 C48.2 C49.2 C50.2 C51.2 C52.2 C53.2 C54.2 C55.2 C56.2 C57.1 C58.1 C59.2 C60.1 C61.2 C64.2 C65.1 C66.2 C67.1 C68.1 C69.2 FB3.2 IC2.3 IC2.6 IC2.11 IC2.14 IC2.28 IC2.33 IMU2.P$20 LDO_VREG2.GND LED3.C SJ3.1 U$29.P$1 XOSC2.2 XOSC2.4 XOSCRF2.2 XOSCRF2.4
GND3: BAL3.2 BAL3.5 BAL3.6 BARO3.3 BARO3.4 BARO3.5 BTN3.2 C70.2 C71.2 C72.2 C73.2 C74.2 C75.2 C76.2 C77.2 C78.2 C79.2 C80.1 C81.1 C82.2 C83.1 C84.2 C87.2 C88.1 C89.2 C90.1 C91.1 C92.2 FB4.2 IC3.3 IC3.6 IC3.11 IC3.14 IC3.28 IC3.33 IMU3.P$20 LDO_VREG3.GND LED4.C SJ4.1 U$62.P$1 XOSC3.2 XOSC3.4 XOSCRF3.2 XOSCRF3.4
GND4: BAL4.2 BAL4.5 BAL4.6 BARO4.3 BARO4.4 BARO4.5 BTN4.2 C93.2 C94.2 C95.2 C96.2 C97.2 C98.2 C99.2 C100.2 C101.2 C102.2 C103.1 C104.1 C105.2 C106.1 C107.2 C110.2 C111.1 C112.2 C113.1 C114.1 C115.2 FB5.2 IC4.3 IC4.6 IC4.11 IC4.14 IC4.28 IC4.33 IMU4.P$20 LDO_VREG4.GND LED5.C SJ5.1 U$82.P$1 XOSC4.2 XOSC4.4 XOSCRF4.2 XOSCRF4.4
GND5: BAL5.2 BAL5.5 BAL5.6 BARO5.3 BARO5.4 BARO5.5 BTN5.2 C116.2 C117.2 C118.2 C119.2 C120.2 C121.2 C122.2 C123.2 C124.2 C125.2 C126.1 C127.1 C128.2 C129.1 C130.2 C133.2 C134.1 C135.2 C136.1 C137.1 C138.2 FB6.2 IC5.3 IC5.6 IC5.11 IC5.14 IC5.28 IC5.33 IMU5.P$20 LDO_VREG5.GND LED6.C SJ6.1 U$102.P$1 XOSC5.2 XOSC5.4 XOSCRF5.2 XOSCRF5.4
N$1: BAL.3 C11.2
N$2: BTN1.1 R3.1
N$3: BAL.4 C12.2
N$4: C32.1 IMU.P$10
N$5: FB1.1 USB.5 USB.6 USB.7 USB.8 USB.9 USB.10 USB.11
N$6: LED1.A R6.2
N$7: BAL1.3 C39.2
N$8: BAL1.4 C40.2
N$9: C46.1 IMU1.P$10
N$10: FB2.1 USB1.5 USB1.6 USB1.7 USB1.8 USB1.9 USB1.10 USB1.11
N$11: BTN2.1 R11.1
N$12: LED3.A R13.2
N$13: LED2.A R4.2
N$14: BAL2.3 C62.2
N$15: BAL2.4 C63.2
N$16: C69.1 IMU2.P$10
N$17: FB3.1 USB2.5 USB2.6 USB2.7 USB2.8 USB2.9 USB2.10 USB2.11
N$18: BTN3.1 R16.1
N$19: LED4.A R18.2
N$20: BAL3.3 C85.2
N$21: BAL3.4 C86.2
N$22: C92.1 IMU3.P$10
N$23: FB4.1 USB3.5 USB3.6 USB3.7 USB3.8 USB3.9 USB3.10 USB3.11
N$24: BTN4.1 R21.1
N$25: LED5.A R23.2
N$26: BTN.1 R1.1
N$27: BAL4.3 C108.2
N$28: BAL4.4 C109.2
N$29: C115.1 IMU4.P$10
N$30: FB5.1 USB4.5 USB4.6 USB4.7 USB4.8 USB4.9 USB4.10 USB4.11
N$31: BTN5.1 R26.1
N$32: LED6.A R28.2
N$33: BAL5.3 C131.2
N$34: BAL5.4 C132.2
N$35: C138.1 IMU5.P$10
N$36: FB6.1 USB5.5 USB5.6 USB5.7 USB5.8 USB5.9 USB5.10 USB5.11
PA1: IC1.25 U$22.P$1
PA2: IC1.27 U$23.P$1
PA3: IC2.25 U$55.P$1
PA4: IC2.27 U$56.P$1
PA5: IC3.25 U$75.P$1
PA6: IC3.27 U$76.P$1
PA06/A0: IC.7 U$54.P$1
PA06/A1: IC1.7 U$24.P$1
PA06/A2: IC2.7 U$57.P$1
PA06/A3: IC3.7 U$77.P$1
PA06/A4: IC4.7 U$97.P$1
PA06/A5: IC5.7 U$117.P$1
PA7: IC4.25 U$95.P$1
PA07/A1: IC.8 U$43.P$1
PA07/A2: IC1.8 U$18.P$1
PA07/A3: IC2.8 U$50.P$1
PA07/A4: IC3.8 U$71.P$1
PA07/A5: IC4.8 U$91.P$1
PA07/A6: IC5.8 U$111.P$1
PA8: IC4.27 U$96.P$1
PA08/I2C/SDA: BARO.7 IC.9 IMU.P$24 R8.1 U$42.P$1
PA08/I2C/SDA1: BARO1.7 IC1.9 IMU1.P$24 R7.1 U$17.P$1
PA08/I2C/SDA2: BARO2.7 IC2.9 IMU2.P$24 R14.1 U$49.P$1
PA08/I2C/SDA3: BARO3.7 IC3.9 IMU3.P$24 R19.1 U$70.P$1
PA08/I2C/SDA4: BARO4.7 IC4.9 IMU4.P$24 R24.1 U$90.P$1
PA08/I2C/SDA5: BARO5.7 IC5.9 IMU5.P$24 R29.1 U$110.P$1
PA9: IC5.25 U$115.P$1
PA09/I2C/SCL: BARO.8 IC.10 IMU.P$23 R9.1 U$41.P$1
PA09/I2C/SCL1: BARO1.8 IC1.10 IMU1.P$23 R10.1 U$16.P$1
PA09/I2C/SCL2: BARO2.8 IC2.10 IMU2.P$23 R15.1 U$44.P$1
PA09/I2C/SCL3: BARO3.8 IC3.10 IMU3.P$23 R20.1 U$69.P$1
PA09/I2C/SCL4: BARO4.8 IC4.10 IMU4.P$23 R25.1 U$89.P$1
PA09/I2C/SCL5: BARO5.8 IC5.10 IMU5.P$23 R30.1 U$109.P$1
PA10: IC5.27 U$116.P$1
PA14/XIN_MC/RX: C3.2 IC.15 XOSC.1
PA14/XIN_MC/RX1: C37.2 IC1.15 XOSC1.1
PA14/XIN_MC/RX2: C60.2 IC2.15 XOSC2.1
PA14/XIN_MC/RX3: C83.2 IC3.15 XOSC3.1
PA14/XIN_MC/RX4: C106.2 IC4.15 XOSC4.1
PA14/XIN_MC/RX5: C129.2 IC5.15 XOSC5.1
PA15/XOUT_MC/TX: C4.1 IC.16 U$39.P$1 XOSC.3
PA15/XOUT_MC/TX1: C38.1 IC1.16 U$15.P$1 XOSC1.3
PA15/XOUT_MC/TX2: C61.1 IC2.16 U$40.P$1 XOSC2.3
PA15/XOUT_MC/TX3: C84.1 IC3.16 U$68.P$1 XOSC3.3
PA15/XOUT_MC/TX4: C107.1 IC4.16 U$88.P$1 XOSC4.3
PA15/XOUT_MC/TX5: C130.1 IC5.16 U$108.P$1 XOSC5.3
PA16/I2C: IC.17 U$38.P$1
PA16/I2C1: IC1.17 U$14.P$1
PA16/I2C2: IC2.17 U$34.P$1
PA16/I2C3: IC3.17 U$67.P$1
PA16/I2C4: IC4.17 U$87.P$1
PA16/I2C5: IC5.17 U$107.P$1
PA17/I2C: IC.18 U$37.P$1
PA17/I2C1: IC1.18 U$13.P$1
PA17/I2C2: IC2.18 U$33.P$1
PA17/I2C3: IC3.18 U$66.P$1
PA17/I2C4: IC4.18 U$86.P$1
PA17/I2C5: IC5.18 U$106.P$1
PA18/FSYNC: IC.19 IMU.P$11 SJ1.2 U$36.P$1
PA18/FSYNC1: IC1.19 IMU1.P$11 SJ2.2 U$12.P$1
PA18/FSYNC2: IC2.19 IMU2.P$11 SJ3.2 U$32.P$1
PA18/FSYNC3: IC3.19 IMU3.P$11 SJ4.2 U$65.P$1
PA18/FSYNC4: IC4.19 IMU4.P$11 SJ5.2 U$85.P$1
PA18/FSYNC5: IC5.19 IMU5.P$11 SJ6.2 U$105.P$1
PA19/INTA: IC.20 IMU.P$12 U$35.P$1
PA19/INTA1: IC1.20 IMU1.P$12 U$11.P$1
PA19/INTA2: IC2.20 IMU2.P$12 U$31.P$1
PA19/INTA3: IC3.20 IMU3.P$12 U$64.P$1
PA19/INTA4: IC4.20 IMU4.P$12 U$84.P$1
PA19/INTA5: IC5.20 IMU5.P$12 U$104.P$1
PA24/USBDM: IC.22 U$9.P$1 USB.2
PA24/USBDM1: IC1.22 U$25.P$1 USB1.2
PA24/USBDM2: IC2.22 U$58.P$1 USB2.2
PA24/USBDM3: IC3.22 U$78.P$1 USB3.2
PA24/USBDM4: IC4.22 U$98.P$1 USB4.2
PA24/USBDM5: IC5.22 U$118.P$1 USB5.2
PA25/USBDP: IC.23 U$10.P$1 USB.3
PA25/USBDP1: IC1.23 U$26.P$1 USB1.3
PA25/USBDP2: IC2.23 U$59.P$1 USB2.3
PA25/USBDP3: IC3.23 U$79.P$1 USB3.3
PA25/USBDP4: IC4.23 U$99.P$1 USB4.3
PA25/USBDP5: IC5.23 U$119.P$1 USB5.3
PA27: IC.25 U$7.P$1
PA28: IC.27 U$48.P$1
PA30/SWCLK: IC.31 R4.1 U$46.P$1
PA30/SWCLK1: IC1.31 R6.1 U$20.P$1
PA30/SWCLK2: IC2.31 R13.1 U$52.P$1
PA30/SWCLK3: IC3.31 R18.1 U$73.P$1
PA30/SWCLK4: IC4.31 R23.1 U$93.P$1
PA30/SWCLK5: IC5.31 R28.1 U$113.P$1
PA31/SWDIO: IC.32 U$47.P$1
PA31/SWDIO1: IC1.32 U$21.P$1
PA31/SWDIO2: IC2.32 U$53.P$1
PA31/SWDIO3: IC3.32 U$74.P$1
PA31/SWDIO4: IC4.32 U$94.P$1
PA31/SWDIO5: IC5.32 U$114.P$1
RESET: C1.1 IC.26 R1.2 R2.1 U$45.P$1
RESET1: C18.1 IC1.26 R3.2 R5.1 U$19.P$1
RESET2: C47.1 IC2.26 R11.2 R12.1 U$51.P$1
RESET3: C70.1 IC3.26 R16.2 R17.1 U$72.P$1
RESET4: C93.1 IC4.26 R21.2 R22.1 U$92.P$1
RESET5: C116.1 IC5.26 R26.2 R27.1 U$112.P$1
RFN: C11.1 IC.13
RFN1: C39.1 IC1.13
RFN2: C62.1 IC2.13
RFN3: C85.1 IC3.13
RFN4: C108.1 IC4.13
RFN5: C131.1 IC5.13
RFP: C12.1 IC.12
RFP1: C40.1 IC1.12
RFP2: C63.1 IC2.12
RFP3: C86.1 IC3.12
RFP4: C109.1 IC4.12
RFP5: C132.1 IC5.12
VDDANA: C8.1 C22.2 IC.4 L6.2
VDDANA1: C26.1 C35.2 IC1.4 L1.2
VDDANA2: C53.1 C58.2 IC2.4 L2.2
VDDANA3: C76.1 C81.2 IC3.4 L3.2
VDDANA4: C99.1 C104.2 IC4.4 L4.2
VDDANA5: C122.1 C127.2 IC5.4 L5.2
VDDCORE: C9.1 IC.29
VDDCORE1: C27.1 IC1.29
VDDCORE2: C54.1 IC2.29
VDDCORE3: C77.1 IC3.29
VDDCORE4: C100.1 IC4.29
VDDCORE5: C123.1 IC5.29
VIN: C6.1 C7.1 LDO_VREG.VIN U$1.P$1 USB.1
VIN1: C23.1 C24.1 LDO_VREG1.VIN U$3.P$1 USB1.1
VIN2: C50.1 C51.1 LDO_VREG2.VIN U$28.P$1 USB2.1
VIN3: C73.1 C74.1 LDO_VREG3.VIN U$61.P$1 USB3.1
VIN4: C96.1 C97.1 LDO_VREG4.VIN U$81.P$1 USB4.1
VIN5: C119.1 C120.1 LDO_VREG5.VIN U$101.P$1 USB5.1
XTALIN: C14.2 IC.2 XOSCRF.1
XTALIN1: C42.2 IC1.2 XOSCRF1.1
XTALIN2: C65.2 IC2.2 XOSCRF2.1
XTALIN3: C88.2 IC3.2 XOSCRF3.1
XTALIN4: C111.2 IC4.2 XOSCRF4.1
XTALIN5: C134.2 IC5.2 XOSCRF5.1
XTALOUT: C15.1 IC.1 XOSCRF.3
XTALOUT1: C43.1 IC1.1 XOSCRF1.3
XTALOUT2: C66.1 IC2.1 XOSCRF2.3
XTALOUT3: C89.1 IC3.1 XOSCRF3.3
XTALOUT4: C112.1 IC4.1 XOSCRF4.3
XTALOUT5: C135.1 IC5.1 XOSCRF5.3

## Tracks (layer width: path | path; a pad name or v marks a point on that pad's centre or on a via)
3.3V  (via drill 0.2 pad 0.51)
  Top 0.14: C31.2 13.96,7.4 v13.99,7.42
  Top 0.152: C30.2 15.01,10.2 v15.01,10.1 | IC.24 16.64,11.27 v16.43,11.07 | C10.1 14.09,8.39 13.99,8.29 v13.99,7.42 | LDO_VREG.VOUT 18.14,9.11 v18.15,9.09 | IC.30 18.21,15.75 v18.46,16
  Top 0.203: C21.2 10.33,18.39
  Top 0.254: 10.33,18.39 L6.1 9.6,18.26 v9.37,17.98 | v18.15,9.09 18.71,8.53 C5.1 19.09,7.75 R2.2
  Route2 0.254: v9.37,17.98 10.03,17.98 11.55,19.51 14.65,19.51 15.66,20.52 19.93,20.52 v21.2,19.25 | v17.01,7.8 17.01,8.66 17.39,9.04 18.1,9.04 v18.15,9.09
  Route15 0.203: v15.01,10.1 15.06,10.15 15.06,10.6 15.28,10.82 16.17,10.82 v16.43,11.07
  Route15 0.254: v21.2,19.25 21.2,19.2 21.56,18.85 21.56,16.92 20.59,15.95 18.51,15.95 v18.46,16
  Bottom 0.14: v13.99,7.42 U$5.P$1 | v15.01,10.1 C30.2
  Bottom 0.152: 14.6,7.42 15.87,7.42 16.2,7.75 16.96,7.75 v17.01,7.8 16.73,8.15 C29.1 | 14.6,7.42 v13.99,7.42 | 14.6,7.42 15.01,7.83 v15.01,10.1 14.51,10.1 13.91,10.69 13.18,10.69 12.97,10.9 12.97,11.89 12.46,12.39 12.46,13.46 13.18,14.17 14.95,14.17 15.36,13.77 15.36,12.85 15.77,12.45 IMU.P$13 | IMU.P$8 19.17,11.48 18.92,11.23 18.92,9.7 | 18.92,9.7 18.92,9.4 18.61,9.09 v18.15,9.09 | IMU.P$22 18.77,15.69 v18.46,16 | 18.92,9.7 19.37,10.16 20.09,10.16 20.8,10.87 20.8,14.39 20.75,14.45
  Bottom 0.203: BARO.1 BARO.2 23.72,14.71 23.08,14.07 21.25,14.07 20.88,14.45 20.75,14.45 IMU.P$1
  Bottom 0.254: BARO.1 23.68,15.96 22.78,16.87 22.78,18.39 21.91,19.25 v21.2,19.25 21,19.25 20.14,20.12 17.7,20.12 R8.2 R9.2
3.3V1  (via drill 0.2 pad 0.51)
  Top 0.14: C44.2 13.96,32.8 v13.99,32.82
  Top 0.152: C45.2 15.01,35.6 v15.01,35.5 | IC1.24 16.64,36.67 v16.43,36.47 | C36.1 14.09,33.79 13.99,33.69 v13.99,32.82 | LDO_VREG1.VOUT 18.14,34.51 v18.15,34.49 | IC1.30 18.21,41.15 v18.46,41.4
  Top 0.203: C34.2 10.33,43.79
  Top 0.254: 10.33,43.79 L1.1 9.6,43.66 v9.37,43.38 | v18.15,34.49 18.71,33.93 C20.1 19.09,33.15 R5.2
  Route2 0.254: v9.37,43.38 10.03,43.38 11.55,44.91 14.65,44.91 15.66,45.92 19.93,45.92 v21.2,44.65 | v17.01,33.2 17.01,34.06 17.39,34.44 18.1,34.44 v18.15,34.49
  Route15 0.203: v15.01,35.5 15.06,35.55 15.06,36 15.28,36.22 16.17,36.22 v16.43,36.47
  Route15 0.254: v21.2,44.65 21.2,44.6 21.56,44.25 21.56,42.32 20.59,41.35 18.51,41.35 v18.46,41.4
  Bottom 0.14: v13.99,32.82 U$6.P$1 | v15.01,35.5 C45.2
  Bottom 0.152: 14.6,32.82 15.87,32.82 16.2,33.15 16.96,33.15 v17.01,33.2 16.73,33.55 C25.1 | 14.6,32.82 v13.99,32.82 | 14.6,32.82 15.01,33.23 v15.01,35.5 14.51,35.5 13.91,36.09 13.18,36.09 12.97,36.3 12.97,37.29 12.46,37.8 12.46,38.86 13.18,39.57 14.95,39.57 15.36,39.17 15.36,38.25 15.77,37.84 IMU1.P$13 | IMU1.P$8 19.17,36.88 18.92,36.63 18.92,35.1 | 18.92,35.1 18.92,34.8 18.61,34.49 v18.15,34.49 | IMU1.P$22 18.77,41.09 v18.46,41.4 | 18.92,35.1 19.37,35.56 20.09,35.56 20.8,36.27 20.8,39.79 20.75,39.84
  Bottom 0.203: BARO1.1 BARO1.2 23.72,40.11 23.08,39.47 21.25,39.47 20.88,39.84 20.75,39.84 IMU1.P$1
  Bottom 0.254: BARO1.1 23.68,41.36 22.78,42.27 22.78,43.79 21.91,44.65 v21.2,44.65 21,44.65 20.14,45.52 17.7,45.52 R7.2 R10.2
3.3V2  (via drill 0.2 pad 0.51)
  Top 0.14: C67.2 13.96,58.2 v13.99,58.22
  Top 0.152: C68.2 15.01,61 v15.01,60.9 | IC2.24 16.64,62.07 v16.43,61.87 | C59.1 14.09,59.19 13.99,59.09 v13.99,58.22 | LDO_VREG2.VOUT 18.14,59.91 v18.15,59.89 | IC2.30 18.21,66.55 v18.46,66.8
  Top 0.203: C57.2 10.33,69.19
  Top 0.254: 10.33,69.19 L2.1 9.6,69.06 v9.37,68.78 | v18.15,59.89 18.71,59.33 C49.1 19.09,58.55 R12.2
  Route2 0.254: v9.37,68.78 10.03,68.78 11.55,70.31 14.65,70.31 15.66,71.32 19.93,71.32 v21.2,70.05 | v17.01,58.6 17.01,59.46 17.39,59.84 18.1,59.84 v18.15,59.89
  Route15 0.203: v15.01,60.9 15.06,60.95 15.06,61.4 15.28,61.62 16.17,61.62 v16.43,61.87
  Route15 0.254: v21.2,70.05 21.2,70 21.56,69.65 21.56,67.72 20.59,66.75 18.51,66.75 v18.46,66.8
  Bottom 0.14: v13.99,58.22 U$30.P$1 | v15.01,60.9 C68.2
  Bottom 0.152: 14.6,58.22 15.87,58.22 16.2,58.55 16.96,58.55 v17.01,58.6 16.73,58.95 C52.1 | 14.6,58.22 v13.99,58.22 | 14.6,58.22 15.01,58.63 v15.01,60.9 14.51,60.9 13.91,61.49 13.18,61.49 12.97,61.7 12.97,62.69 12.46,63.2 12.46,64.26 13.18,64.97 14.95,64.97 15.36,64.57 15.36,63.65 15.77,63.24 IMU2.P$13 | IMU2.P$8 19.17,62.28 18.92,62.03 18.92,60.5 | 18.92,60.5 18.92,60.2 18.61,59.89 v18.15,59.89 | IMU2.P$22 18.77,66.49 v18.46,66.8 | 18.92,60.5 19.37,60.96 20.09,60.96 20.8,61.67 20.8,65.19 20.75,65.25
  Bottom 0.203: BARO2.1 BARO2.2 23.72,65.51 23.08,64.87 21.25,64.87 20.88,65.25 20.75,65.25 IMU2.P$1
  Bottom 0.254: BARO2.1 23.68,66.76 22.78,67.67 22.78,69.19 21.91,70.05 v21.2,70.05 21,70.05 20.14,70.92 17.7,70.92 R14.2 R15.2
3.3V3  (via drill 0.2 pad 0.51)
  Top 0.14: C90.2 44.44,7.4 v44.47,7.42
  Top 0.152: C91.2 45.49,10.2 v45.49,10.1 | IC3.24 47.12,11.27 v46.91,11.07 | C82.1 44.57,8.39 44.47,8.29 v44.47,7.42 | LDO_VREG3.VOUT 48.62,9.11 v48.63,9.09 | IC3.30 48.69,15.75 v48.94,16
  Top 0.203: C80.2 40.81,18.39
  Top 0.254: 40.81,18.39 L3.1 40.08,18.26 v39.85,17.98 | v48.63,9.09 49.19,8.53 C72.1 49.57,7.75 R17.2
  Route2 0.254: v39.85,17.98 40.51,17.98 42.03,19.51 45.13,19.51 46.15,20.52 50.41,20.52 v51.68,19.25 | v47.49,7.8 47.49,8.66 47.87,9.04 48.58,9.04 v48.63,9.09
  Route15 0.203: v45.49,10.1 45.54,10.15 45.54,10.6 45.76,10.82 46.65,10.82 v46.91,11.07
  Route15 0.254: v51.68,19.25 51.68,19.2 52.04,18.85 52.04,16.92 51.07,15.95 48.99,15.95 v48.94,16
  Bottom 0.14: v44.47,7.42 U$63.P$1 | v45.49,10.1 C91.2
  Bottom 0.152: 45.08,7.42 46.35,7.42 46.68,7.75 47.44,7.75 v47.49,7.8 47.21,8.15 C75.1 | 45.08,7.42 v44.47,7.42 | 45.08,7.42 45.49,7.83 v45.49,10.1 44.99,10.1 44.39,10.69 43.66,10.69 43.45,10.9 43.45,11.89 42.95,12.39 42.95,13.46 43.66,14.17 45.43,14.17 45.84,13.77 45.84,12.85 46.25,12.45 IMU3.P$13 | IMU3.P$8 49.65,11.48 49.4,11.23 49.4,9.7 | 49.4,9.7 49.4,9.4 49.09,9.09 v48.63,9.09 | IMU3.P$22 49.25,15.69 v48.94,16 | 49.4,9.7 49.85,10.16 50.56,10.16 51.28,10.87 51.28,14.39 51.23,14.45
  Bottom 0.203: BARO3.1 BARO3.2 54.2,14.71 53.56,14.07 51.73,14.07 51.36,14.45 51.23,14.45 IMU3.P$1
  Bottom 0.254: BARO3.1 54.16,15.96 53.26,16.87 53.26,18.39 52.39,19.25 v51.68,19.25 51.48,19.25 50.62,20.12 48.18,20.12 R19.2 R20.2
3.3V4  (via drill 0.2 pad 0.51)
  Top 0.14: C113.2 44.44,32.8 v44.47,32.82
  Top 0.152: C114.2 45.49,35.6 v45.49,35.5 | IC4.24 47.12,36.67 v46.91,36.47 | C105.1 44.57,33.79 44.47,33.69 v44.47,32.82 | LDO_VREG4.VOUT 48.62,34.51 v48.63,34.49 | IC4.30 48.69,41.15 v48.94,41.4
  Top 0.203: C103.2 40.81,43.79
  Top 0.254: 40.81,43.79 L4.1 40.08,43.66 v39.85,43.38 | v48.63,34.49 49.19,33.93 C95.1 49.57,33.15 R22.2
  Route2 0.254: v39.85,43.38 40.51,43.38 42.03,44.91 45.13,44.91 46.15,45.92 50.41,45.92 v51.68,44.65 | v47.49,33.2 47.49,34.06 47.87,34.44 48.58,34.44 v48.63,34.49
  Route15 0.203: v45.49,35.5 45.54,35.55 45.54,36 45.76,36.22 46.65,36.22 v46.91,36.47
  Route15 0.254: v51.68,44.65 51.68,44.6 52.04,44.25 52.04,42.32 51.07,41.35 48.99,41.35 v48.94,41.4
  Bottom 0.14: v44.47,32.82 U$83.P$1 | v45.49,35.5 C114.2
  Bottom 0.152: 45.08,32.82 46.35,32.82 46.68,33.15 47.44,33.15 v47.49,33.2 47.21,33.55 C98.1 | 45.08,32.82 v44.47,32.82 | 45.08,32.82 45.49,33.23 v45.49,35.5 44.99,35.5 44.39,36.09 43.66,36.09 43.45,36.3 43.45,37.29 42.95,37.8 42.95,38.86 43.66,39.57 45.43,39.57 45.84,39.17 45.84,38.25 46.25,37.84 IMU4.P$13 | IMU4.P$8 49.65,36.88 49.4,36.63 49.4,35.1 | 49.4,35.1 49.4,34.8 49.09,34.49 v48.63,34.49 | IMU4.P$22 49.25,41.09 v48.94,41.4 | 49.4,35.1 49.85,35.56 50.56,35.56 51.28,36.27 51.28,39.79 51.23,39.84
  Bottom 0.203: BARO4.1 BARO4.2 54.2,40.11 53.56,39.47 51.73,39.47 51.36,39.84 51.23,39.84 IMU4.P$1
  Bottom 0.254: BARO4.1 54.16,41.36 53.26,42.27 53.26,43.79 52.39,44.65 v51.68,44.65 51.48,44.65 50.62,45.52 48.18,45.52 R24.2 R25.2
3.3V5  (via drill 0.2 pad 0.51)
  Top 0.14: C136.2 44.44,58.2 v44.47,58.22
  Top 0.152: C137.2 45.49,61 v45.49,60.9 | IC5.24 47.12,62.07 v46.91,61.87 | C128.1 44.57,59.19 44.47,59.09 v44.47,58.22 | LDO_VREG5.VOUT 48.62,59.91 v48.63,59.89 | IC5.30 48.69,66.55 v48.94,66.8
  Top 0.203: C126.2 40.81,69.19
  Top 0.254: 40.81,69.19 L5.1 40.08,69.06 v39.85,68.78 | v48.63,59.89 49.19,59.33 C118.1 49.57,58.55 R27.2
  Route2 0.254: v39.85,68.78 40.51,68.78 42.03,70.31 45.13,70.31 46.15,71.32 50.41,71.32 v51.68,70.05 | v47.49,58.6 47.49,59.46 47.87,59.84 48.58,59.84 v48.63,59.89
  Route15 0.203: v45.49,60.9 45.54,60.95 45.54,61.4 45.76,61.62 46.65,61.62 v46.91,61.87
  Route15 0.254: v51.68,70.05 51.68,70 52.04,69.65 52.04,67.72 51.07,66.75 48.99,66.75 v48.94,66.8
  Bottom 0.14: v44.47,58.22 U$103.P$1 | v45.49,60.9 C137.2
  Bottom 0.152: 45.08,58.22 46.35,58.22 46.68,58.55 47.44,58.55 v47.49,58.6 47.21,58.95 C121.1 | 45.08,58.22 v44.47,58.22 | 45.08,58.22 45.49,58.63 v45.49,60.9 44.99,60.9 44.39,61.49 43.66,61.49 43.45,61.7 43.45,62.69 42.95,63.2 42.95,64.26 43.66,64.97 45.43,64.97 45.84,64.57 45.84,63.65 46.25,63.24 IMU5.P$13 | IMU5.P$8 49.65,62.28 49.4,62.03 49.4,60.5 | 49.4,60.5 49.4,60.2 49.09,59.89 v48.63,59.89 | IMU5.P$22 49.25,66.49 v48.94,66.8 | 49.4,60.5 49.85,60.96 50.56,60.96 51.28,61.67 51.28,65.19 51.23,65.25
  Bottom 0.203: BARO5.1 BARO5.2 54.2,65.51 53.56,64.87 51.73,64.87 51.36,65.25 51.23,65.25 IMU5.P$1
  Bottom 0.254: BARO5.1 54.16,66.76 53.26,67.67 53.26,69.19 52.39,70.05 v51.68,70.05 51.48,70.05 50.62,70.92 48.18,70.92 R29.2 R30.2
ANT_OUT  (via drill 0.2 pad 0.51)
  Top 0.203: v11.07,14.66 10.91,14.71 10.76,14.86 10.76,15.54 BAL.1 | v8.35,11.28 arc-90 7.99,13.06 U$8.ANT 8.28,13.18 8.59,12.87 arc90 8.96,11.58 arc90 10.03,11.79 10.03,11.99 C13.1
  Bottom 0.203: v11.07,14.66 10.69,14.28 10.69,12.6 arc-114 8.45,11.23 v8.35,11.28
ANT_OUT1  (via drill 0.2 pad 0.51)
  Top 0.203: v11.07,40.06 10.91,40.11 10.76,40.26 10.76,40.94 BAL1.1 | v8.35,36.68 arc-90 7.99,38.46 U$27.ANT 8.28,38.58 8.59,38.27 arc90 8.96,36.98 arc90 10.03,37.19 10.03,37.39 C41.1
  Bottom 0.203: v11.07,40.06 10.69,39.67 10.69,38 arc-114 8.45,36.63 v8.35,36.68
ANT_OUT2  (via drill 0.2 pad 0.51)
  Top 0.203: v11.07,65.46 10.91,65.51 10.76,65.66 10.76,66.34 BAL2.1 | v8.35,62.08 arc-90 7.99,63.86 U$60.ANT 8.28,63.98 8.59,63.67 arc90 8.96,62.38 arc90 10.03,62.59 10.03,62.79 C64.1
  Bottom 0.203: v11.07,65.46 10.69,65.08 10.69,63.4 arc-114 8.45,62.03 v8.35,62.08
ANT_OUT3  (via drill 0.2 pad 0.51)
  Top 0.203: v41.55,14.66 41.4,14.71 41.24,14.86 41.24,15.54 BAL3.1 | v38.83,11.28 arc-90 38.47,13.06 U$80.ANT 38.76,13.18 39.06,12.87 arc90 39.44,11.58 arc90 40.51,11.79 40.51,11.99 C87.1
  Bottom 0.203: v41.55,14.66 41.17,14.28 41.17,12.6 arc-114 38.93,11.23 v38.83,11.28
ANT_OUT4  (via drill 0.2 pad 0.51)
  Top 0.203: v41.55,40.06 41.4,40.11 41.24,40.26 41.24,40.94 BAL4.1 | v38.83,36.68 arc-90 38.47,38.46 U$100.ANT 38.76,38.58 39.06,38.27 arc90 39.44,36.98 arc90 40.51,37.19 40.51,37.39 C110.1
  Bottom 0.203: v41.55,40.06 41.17,39.67 41.17,38 arc-114 38.93,36.63 v38.83,36.68
ANT_OUT5  (via drill 0.2 pad 0.51)
  Top 0.203: v41.55,65.46 41.4,65.51 41.24,65.66 41.24,66.34 BAL5.1 | v38.83,62.08 arc-90 38.47,63.86 U$120.ANT 38.76,63.98 39.06,63.67 arc90 39.44,62.38 arc90 40.51,62.59 40.51,62.79 C133.1
  Bottom 0.203: v41.55,65.46 41.17,65.08 41.17,63.4 arc-114 38.93,62.03 v38.83,62.08
AVDD  (via drill 0.2 pad 0.51)
  Top 0.152: IC.5 14.64,16.55 v14.6,16.51
  Top 0.254: C17.1 v19.63,18.19
  Route2 0.254: v19.63,18.19 20.04,18.19 20.49,17.73 20.49,15.9 19.83,15.24 18.15,15.24 17.49,15.9 17.49,16.66 17.09,17.07 16.38,17.07 15.97,16.66 15.97,15.85 15.51,15.39 14.9,15.39 14.6,15.7 v14.6,16.51
AVDD1  (via drill 0.2 pad 0.51)
  Top 0.152: IC1.5 14.64,41.95 v14.6,41.91
  Top 0.254: C33.1 v19.63,43.59
  Route2 0.254: v19.63,43.59 20.04,43.59 20.49,43.13 20.49,41.3 19.83,40.64 18.15,40.64 17.49,41.3 17.49,42.06 17.09,42.47 16.38,42.47 15.97,42.06 15.97,41.25 15.51,40.79 14.9,40.79 14.6,41.1 v14.6,41.91
AVDD2  (via drill 0.2 pad 0.51)
  Top 0.152: IC2.5 14.64,67.35 v14.6,67.31
  Top 0.254: C56.1 v19.63,68.99
  Route2 0.254: v19.63,68.99 20.04,68.99 20.49,68.53 20.49,66.7 19.83,66.04 18.15,66.04 17.49,66.7 17.49,67.46 17.09,67.87 16.38,67.87 15.97,67.46 15.97,66.65 15.51,66.19 14.9,66.19 14.6,66.5 v14.6,67.31
AVDD3  (via drill 0.2 pad 0.51)
  Top 0.152: IC3.5 45.12,16.55 v45.08,16.51
  Top 0.254: C79.1 v50.11,18.19
  Route2 0.254: v50.11,18.19 50.52,18.19 50.97,17.73 50.97,15.9 50.31,15.24 48.63,15.24 47.97,15.9 47.97,16.66 47.57,17.07 46.86,17.07 46.45,16.66 46.45,15.85 45.99,15.39 45.38,15.39 45.08,15.7 v45.08,16.51
AVDD4  (via drill 0.2 pad 0.51)
  Top 0.152: IC4.5 45.12,41.95 v45.08,41.91
  Top 0.254: C102.1 v50.11,43.59
  Route2 0.254: v50.11,43.59 50.52,43.59 50.97,43.13 50.97,41.3 50.31,40.64 48.63,40.64 47.97,41.3 47.97,42.06 47.57,42.47 46.86,42.47 46.45,42.06 46.45,41.25 45.99,40.79 45.38,40.79 45.08,41.1 v45.08,41.91
AVDD5  (via drill 0.2 pad 0.51)
  Top 0.152: IC5.5 45.12,67.35 v45.08,67.31
  Top 0.254: C125.1 v50.11,68.99
  Route2 0.254: v50.11,68.99 50.52,68.99 50.97,68.53 50.97,66.7 50.31,66.04 48.63,66.04 47.97,66.7 47.97,67.46 47.57,67.87 46.86,67.87 46.45,67.46 46.45,66.65 45.99,66.19 45.38,66.19 45.08,66.5 v45.08,67.31
BOTTOM
  pour Bottom (isolate 0.508): 9.11,18.41 9.11,17.58 11.91,17.58 11.91,15.88 12.54,15.88 12.54,16.51 20.54,16.51 20.54,11.43 12.54,11.43 12.54,15.85 11.91,15.85 11.91,11.05 8.48,11.05 8.48,10.51 arc60 16.08,6.08 arc90 24.08,14.08 arc90 16.08,22.08 arc60
BOTTOM1
  pour Bottom (isolate 0.508): 9.11,43.81 9.11,42.98 11.91,42.98 11.91,41.27 12.54,41.27 12.54,41.91 20.54,41.91 20.54,36.83 12.54,36.83 12.54,41.25 11.91,41.25 11.91,36.45 8.48,36.45 8.48,35.91 arc60 16.08,31.48 arc90 24.08,39.48 arc90 16.08,47.48 arc60
BOTTOM2
  pour Bottom (isolate 0.508): 9.11,69.21 9.11,68.38 11.91,68.38 11.91,66.67 12.54,66.67 12.54,67.31 20.54,67.31 20.54,62.23 12.54,62.23 12.54,66.65 11.91,66.65 11.91,61.85 8.48,61.85 8.48,61.31 arc60 16.08,56.88 arc90 24.08,64.88 arc90 16.08,72.88 arc60
BOTTOM3
  pour Bottom (isolate 0.508): 39.59,18.41 39.59,17.58 42.39,17.58 42.39,15.88 43.02,15.88 43.02,16.51 51.02,16.51 51.02,11.43 43.02,11.43 43.02,15.85 42.39,15.85 42.39,11.05 38.96,11.05 38.96,10.51 arc60 46.56,6.08 arc90 54.56,14.08 arc90 46.56,22.08 arc60
BOTTOM4
  pour Bottom (isolate 0.508): 39.59,43.81 39.59,42.98 42.39,42.98 42.39,41.27 43.02,41.27 43.02,41.91 51.02,41.91 51.02,36.83 43.02,36.83 43.02,41.25 42.39,41.25 42.39,36.45 38.96,36.45 38.96,35.91 arc60 46.56,31.48 arc90 54.56,39.48 arc90 46.56,47.48 arc60
BOTTOM5
  pour Bottom (isolate 0.508): 39.59,69.21 39.59,68.38 42.39,68.38 42.39,66.67 43.02,66.67 43.02,67.31 51.02,67.31 51.02,62.23 43.02,62.23 43.02,66.65 42.39,66.65 42.39,61.85 38.96,61.85 38.96,61.31 arc60 46.56,56.88 arc90 54.56,64.88 arc90 46.56,72.88 arc60
DVDD
  Top 0.14: IC.21 15.14,11.45 C2.1
DVDD1
  Top 0.14: IC1.21 15.14,36.85 C19.1
DVDD2
  Top 0.14: IC2.21 15.14,62.25 C48.1
DVDD3
  Top 0.14: IC3.21 45.62,11.45 C71.1
DVDD4
  Top 0.14: IC4.21 45.62,36.85 C94.1
DVDD5
  Top 0.14: IC5.21 45.62,62.25 C117.1
GND  (via drill 0.2 pad 0.51)
  Top 0.14: IC.14 12.26,14.28 | 14.14,14.53 14.62,15 IC.33 | 10.78,13.92 BAL.6 | 10.97,12.12 11.25,11.83 C4.2 | C3.1 10.87,9.92 XOSC.4 | v15.81,10.1 C30.1 15.76,10.62 15.61,10.77 15.46,10.77 | 15.46,10.77 14.19,10.77 XOSC.2 | C2.2 15.79,11.09 15.46,10.77 | 17.9,10.16 17.85,10.11
  Top 0.152: 12.26,14.28 13.48,14.28 13.73,14.53 14.14,14.53 | IC.14 11.48,14.25 11.14,13.92 10.78,13.92 | 13.31,20.37 C14.1 | XOSCRF.4 XOSCRF.2 | C3.1 9.93,10.86 9.93,11.07 10.97,12.12 10.69,12.39 10.69,12.75 10.62,12.82 C13.2 | C31.1 13.26,8.26 C10.2 13.36,8.69 13.56,8.89 14.68,8.89 C6.2 | C7.2 14.73,7.7 14.7,7.72 C6.2 | IC.11 12.71,15.75 13.18,15.29 14.6,15.29 IC.33 | IC.6 14.14,16.91 14.04,16.82 14.04,16.26 14.14,16.15 14.14,15.75 IC.33 | IC.3 15.64,17.15 15.77,17.02 15.77,16.51 15.46,16.2 15.46,15.58 IC.33 | LDO_VREG.GND 18.2,7.21 v18.2,7.21 | BTN.2 21.33,8.21 v21.3,8.18 | C9.2 18.96,17.37 19.48,17.37 19.73,17.12 19.73,15.39 19.09,14.75 IC.28 17.17,14.75 16.78,15.14 16.78,15.65 v16.68,15.75 15.63,15.75 IC.33 | C6.2 14.7,9.27 13.83,10.14 XOSC.2
  Top 0.203: BAL.5 BAL.2 | BAL.5 10.13,12.85 C13.2 | BAL.5 BAL.6 | C21.1 C22.1 | 17.85,10.11 17.19,10.11 | 17.19,10.11 15.82,10.11 v15.81,10.1 | 17.9,10.16 FB1.2 | 17.86,7.32 LDO_VREG.GND 16.74,7.21 16.45,7.49 16.45,9.37 17.19,10.11
  Top 0.254: C21.1 12.24,20.04 12.57,20.37 13.31,20.37 | C14.1 14.34,20.47 XOSCRF.4 | XOSCRF.2 17.2,18.83 C15.2 18.8,18.19 C17.2 | C17.2 18.92,18.8 C8.2 19.18,19.46 19.32,19.61 20.28,19.61 LED2.C | C17.2 18.94,18.17 C9.2 | C1.2 20.88,7.75 v21.3,8.18 | C5.2 17.7,7.21 LDO_VREG.GND
  Route15 0.203: U$2.P$1 15.06,7.71 14.8,7.98 14.8,8.71 15.01,8.91 15.03,8.91 15.81,9.7 v15.81,10.1
  Bottom 0.14: XOSC.4 11.65,9.6 arc46 XOSC.2 | C30.1 v15.81,10.1 16.51,10.1 C29.2
  Bottom 0.152: IMU.P$20 17.97,15.63 17.85,15.75 v16.68,15.75 | BARO.5 BARO.4 | BARO.3 BARO.4 | C32.2 23.76,12 BARO.4
  Bottom 0.203: SJ1.1 14.06,12.45 15.11,11.4 C2.2
  Bottom 0.254: v18.2,7.21 18.56,7.21 18.97,7.62 20.75,7.62 v21.3,8.18 21.33,8.21 BTN.2 23.76,10.66 C32.2
  other vias: 10.89,9.72 13.58,10.14 11.25,11.64 10.16,10.62 15.79,11.4
GND1  (via drill 0.2 pad 0.51)